# Altium PCB Copy of RT_SUPER_MK90.PCBdoc (part 1 of 3)
Units mil, origin at the board's own origin, x right, y up, seen from the top; angles counter-clockwise.
Board outline 1549.87 x 1549.87 mil, 4 copper layers (Top Layer, GND, PWR, Bottom Layer), stack 39.556 mil thick; 179 components, 119 nets, 506 pads, 207 vias.
Unrouted connection lines stored in the file: 7.
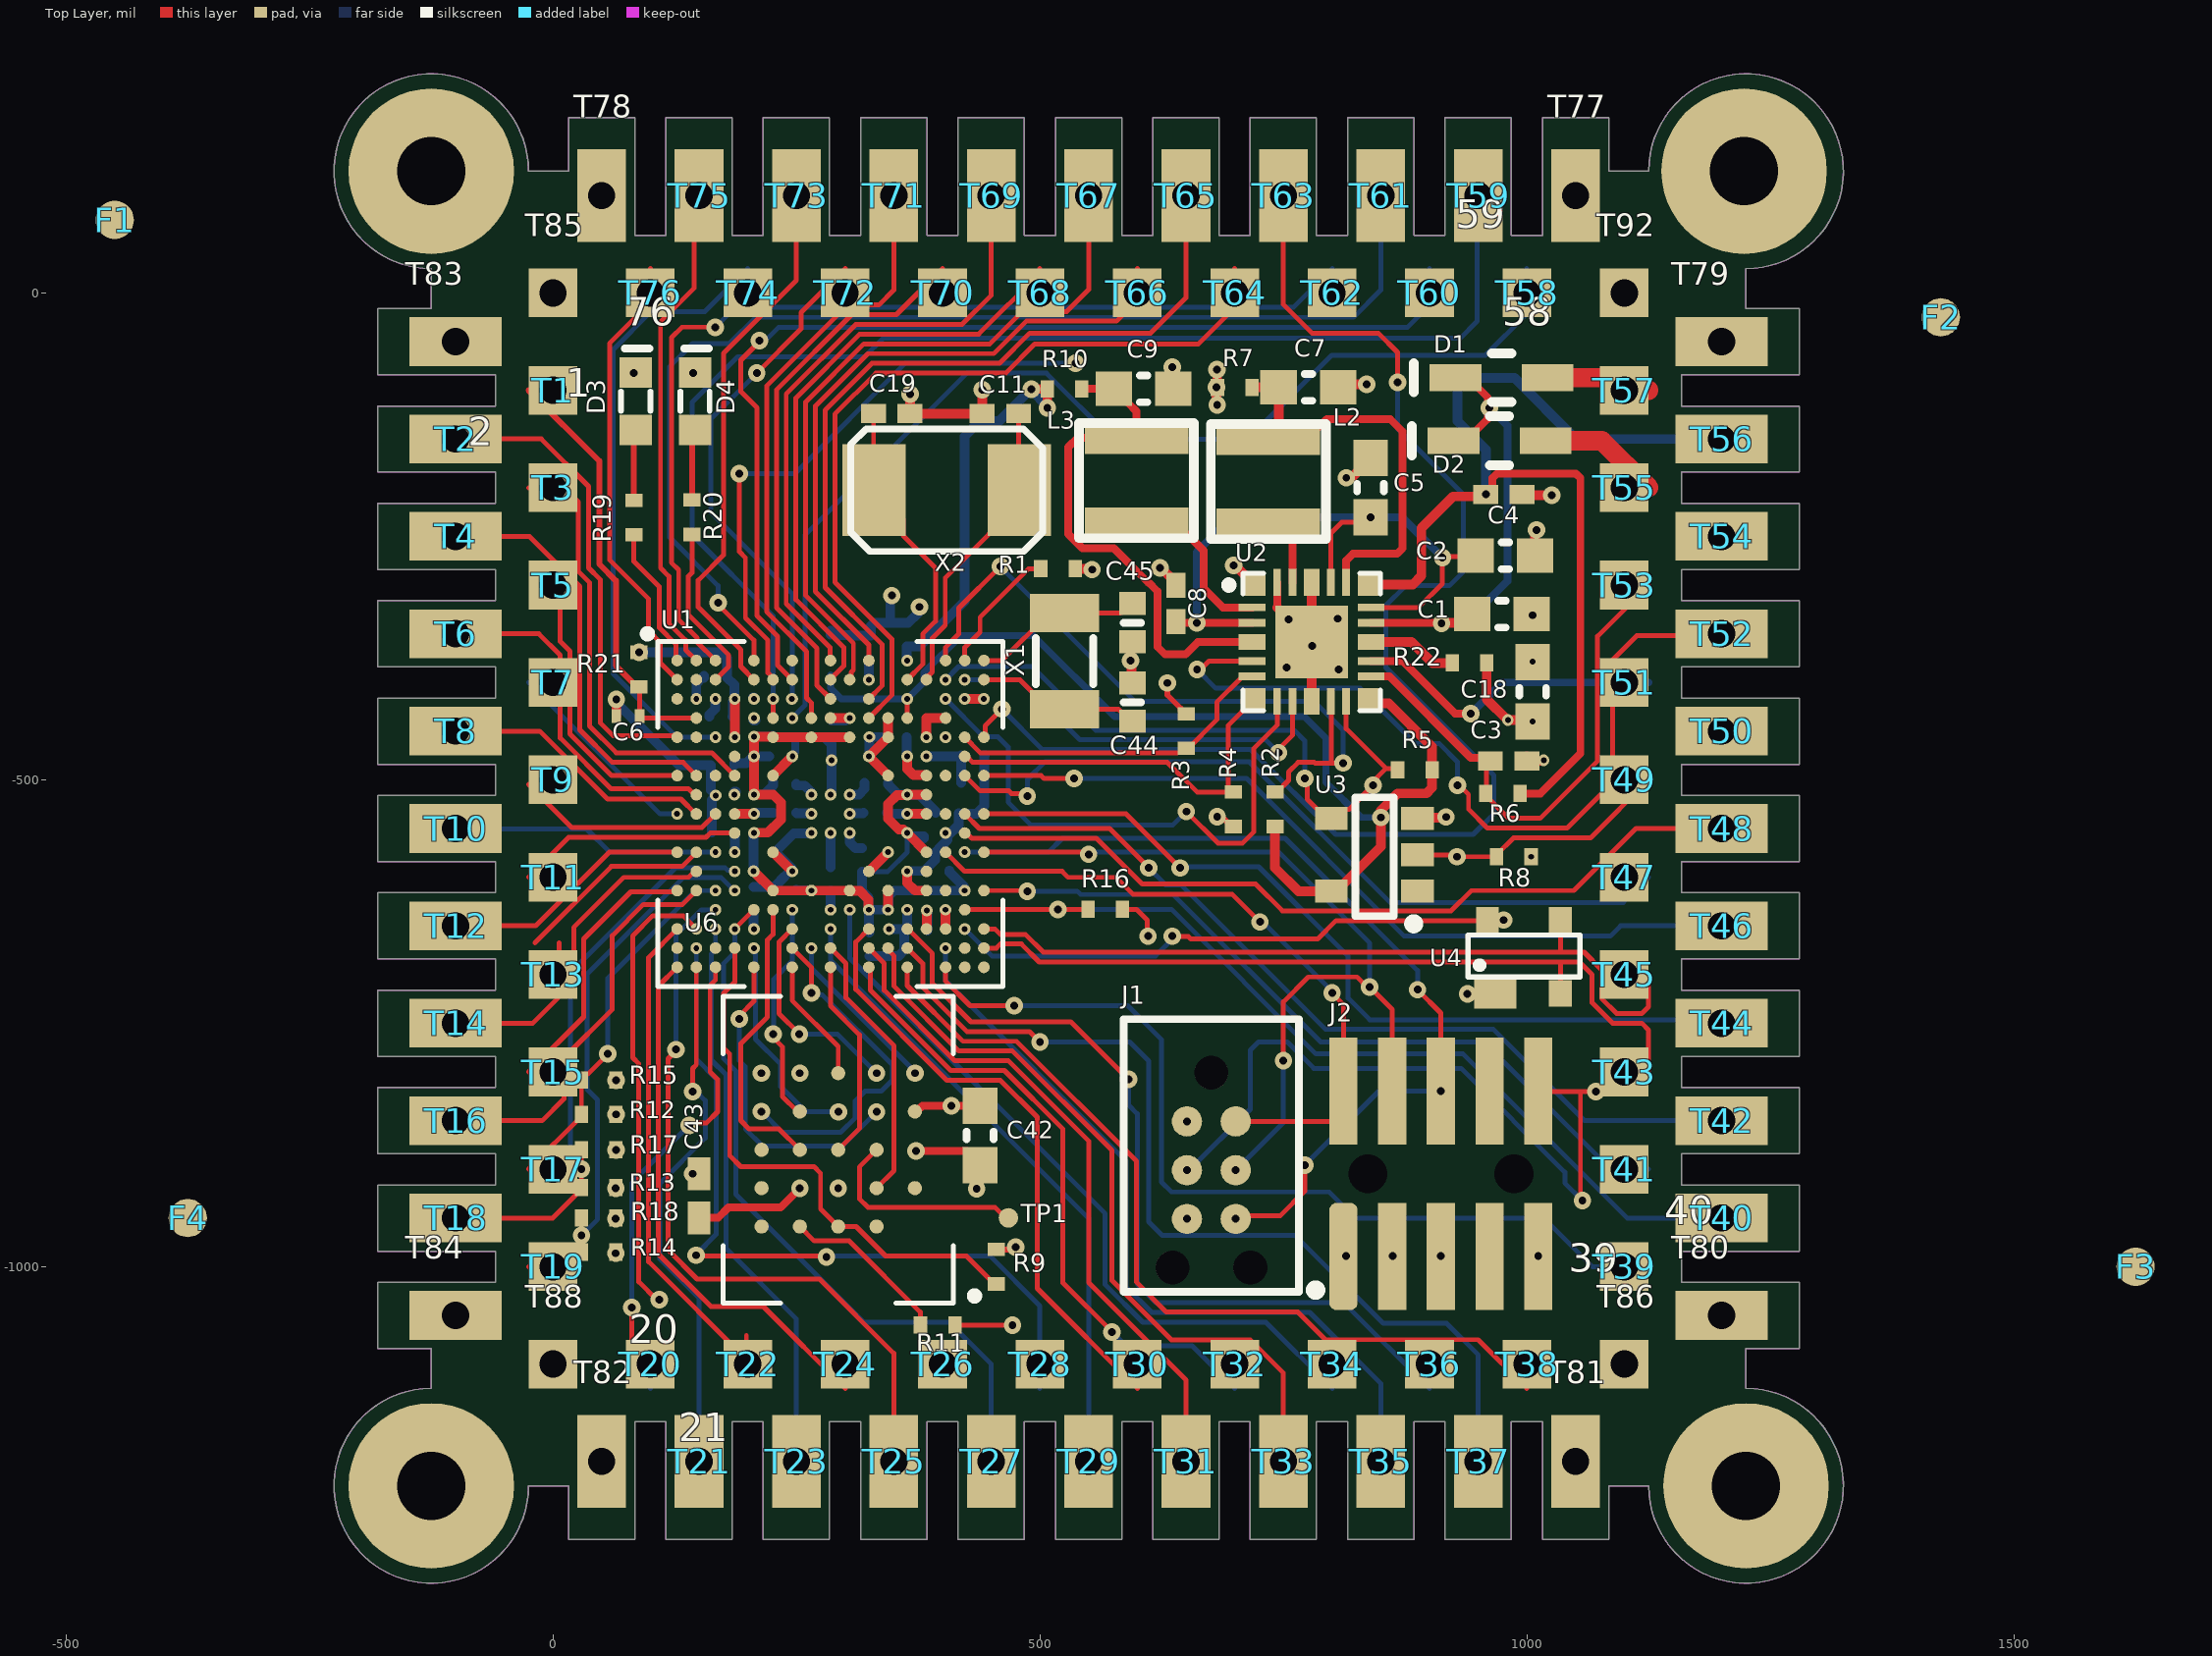
[diagram p0: Top Layer view]
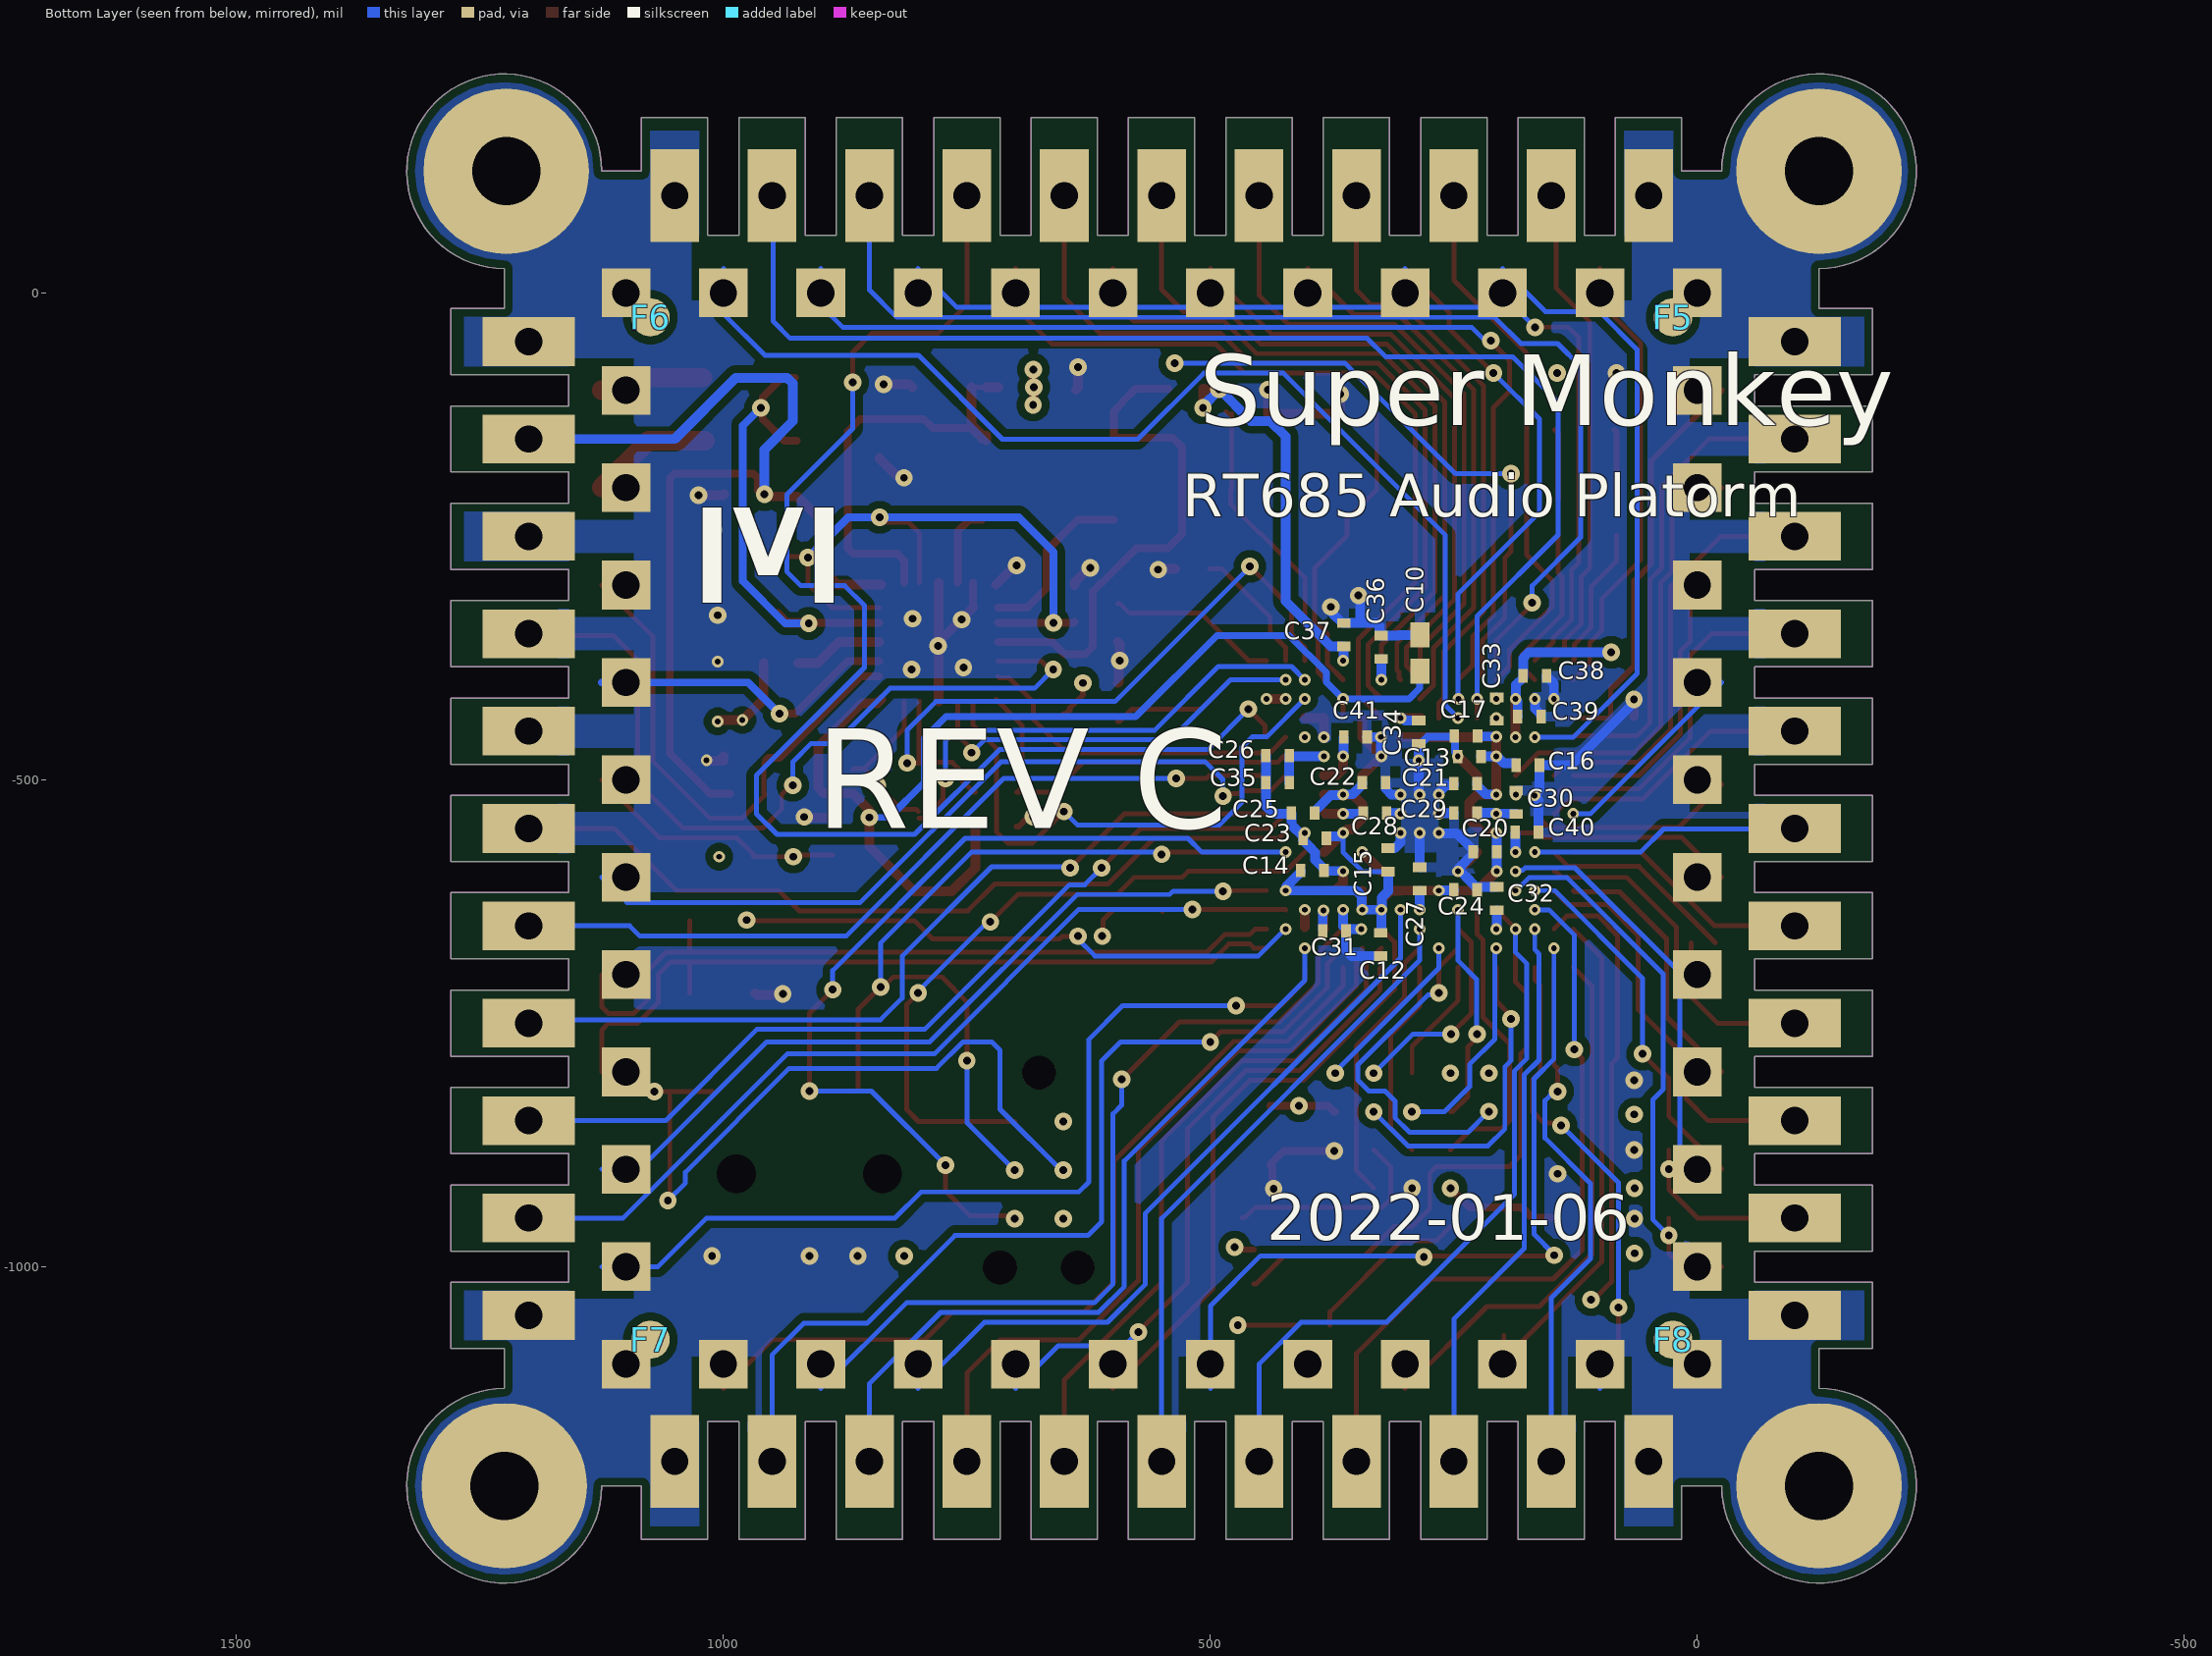
[diagram p1: Bottom Layer view, seen from below]
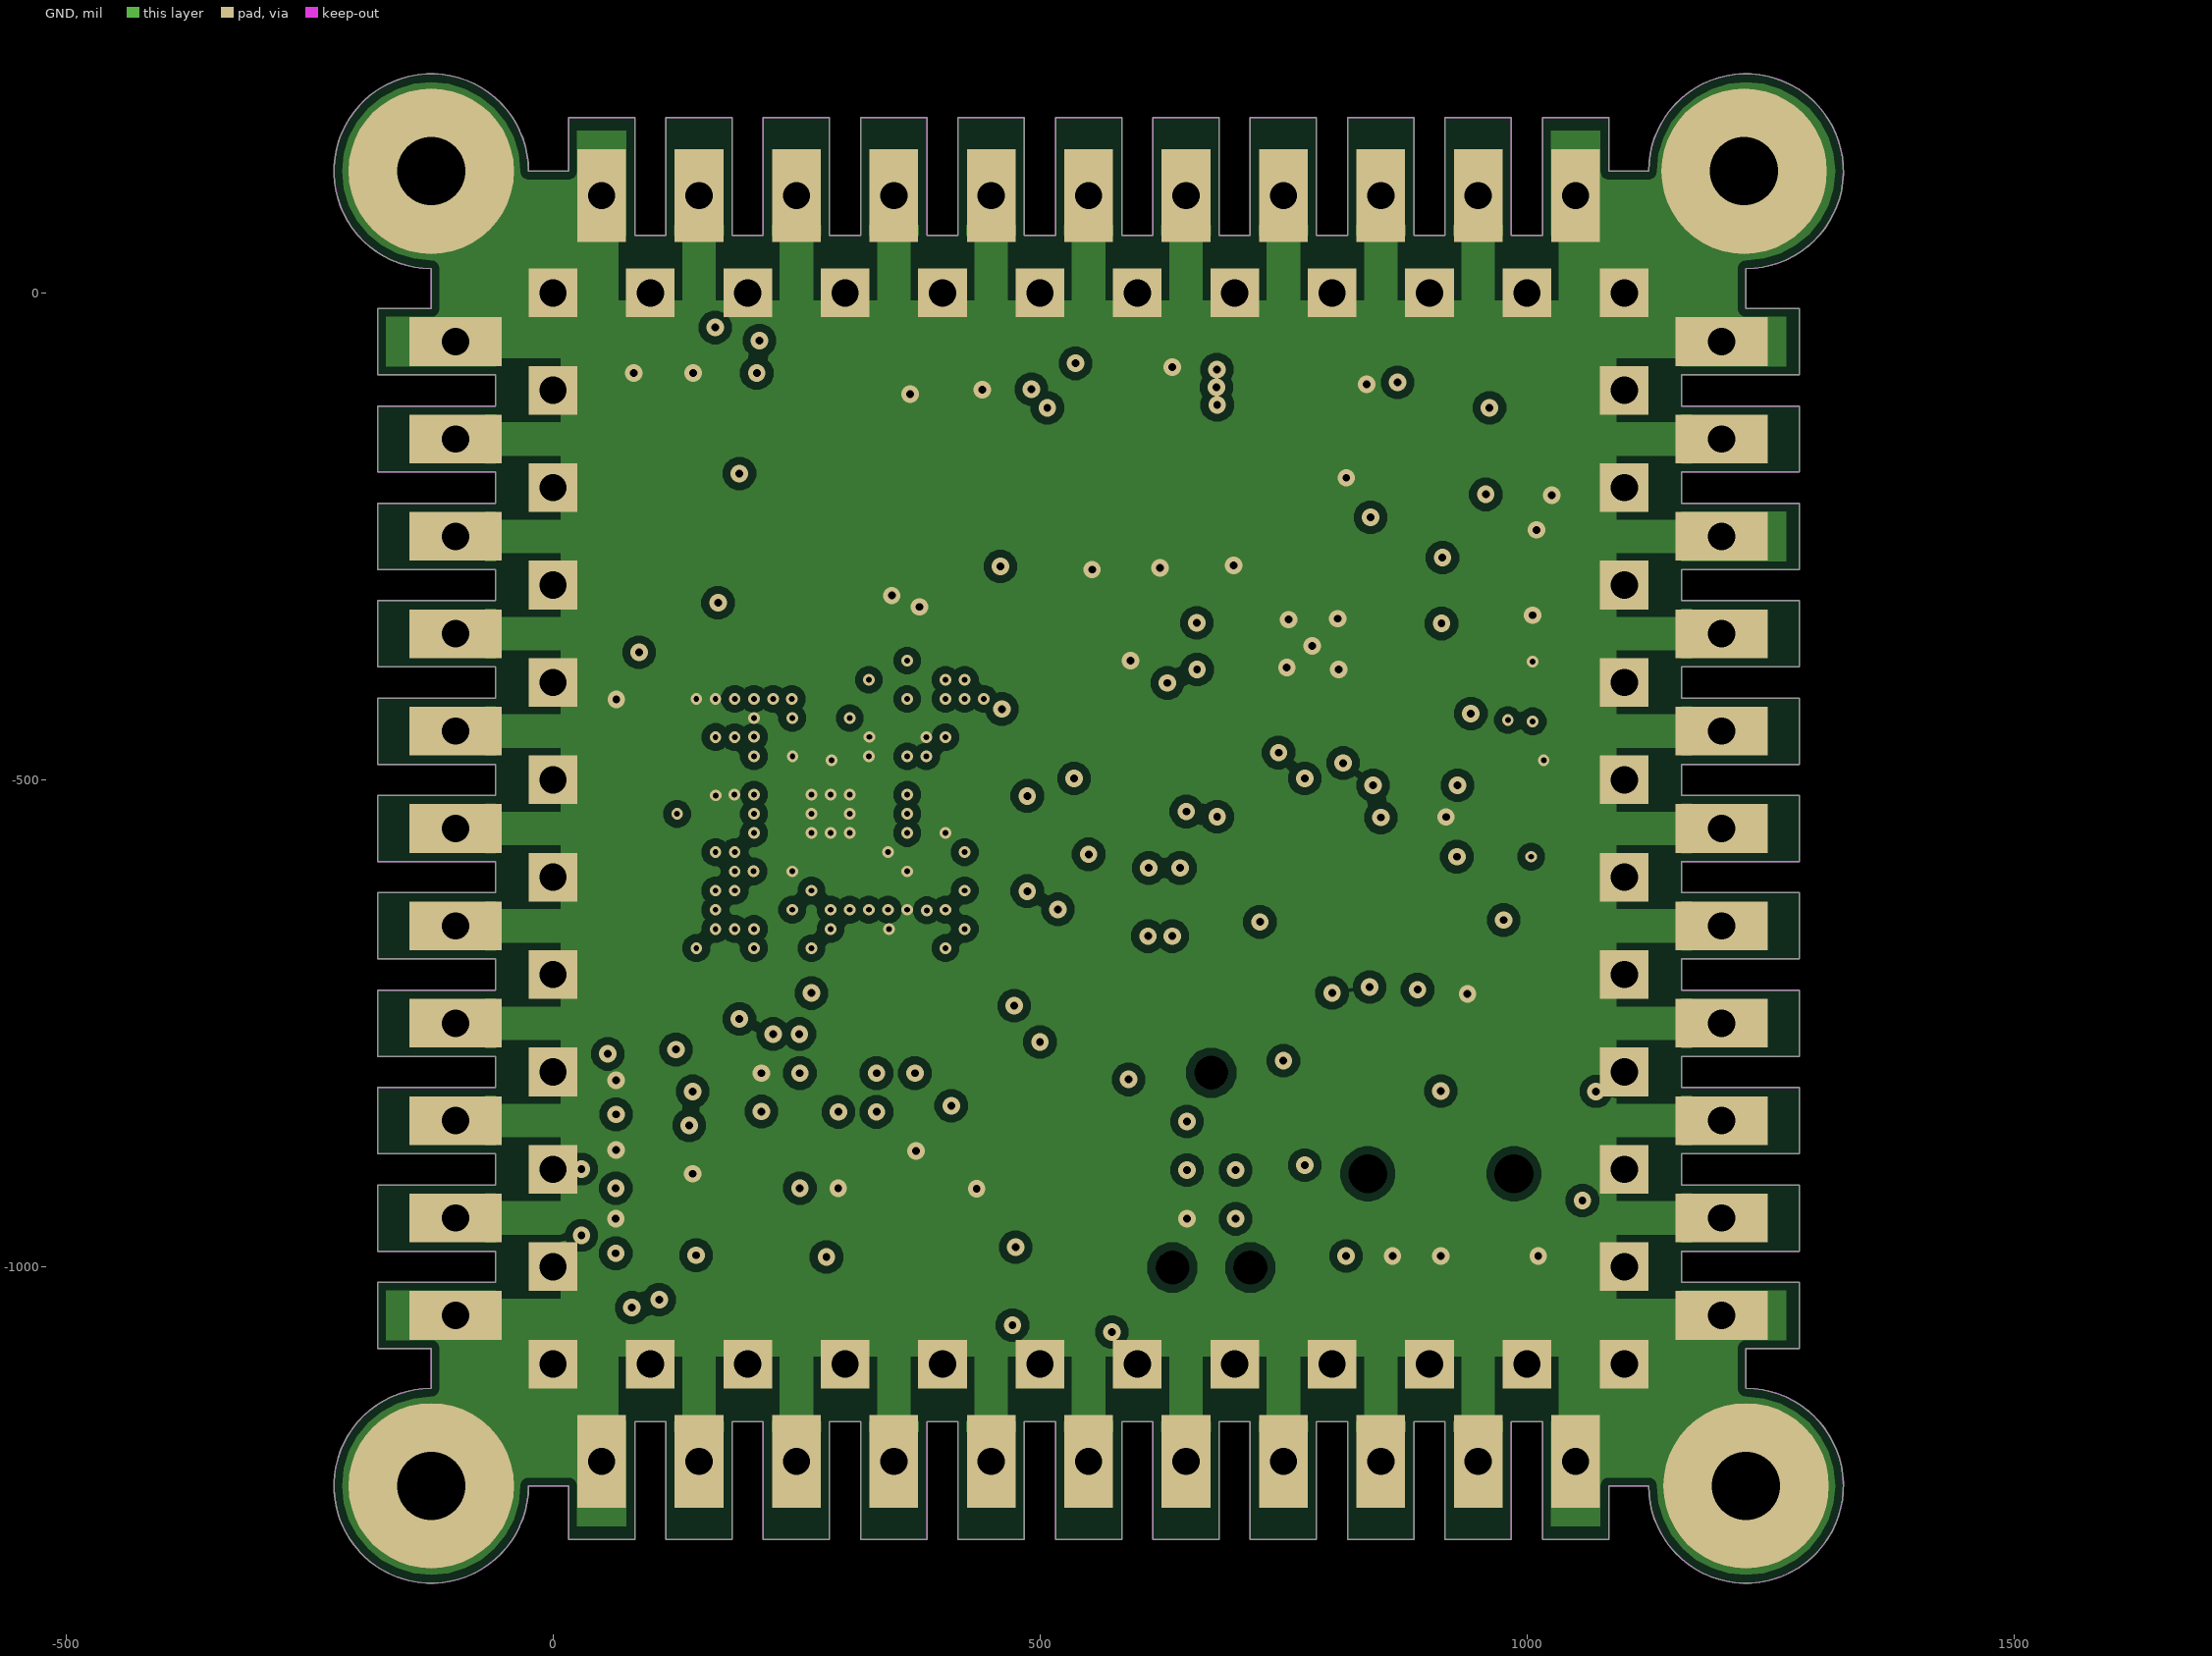
[diagram p2: GND]
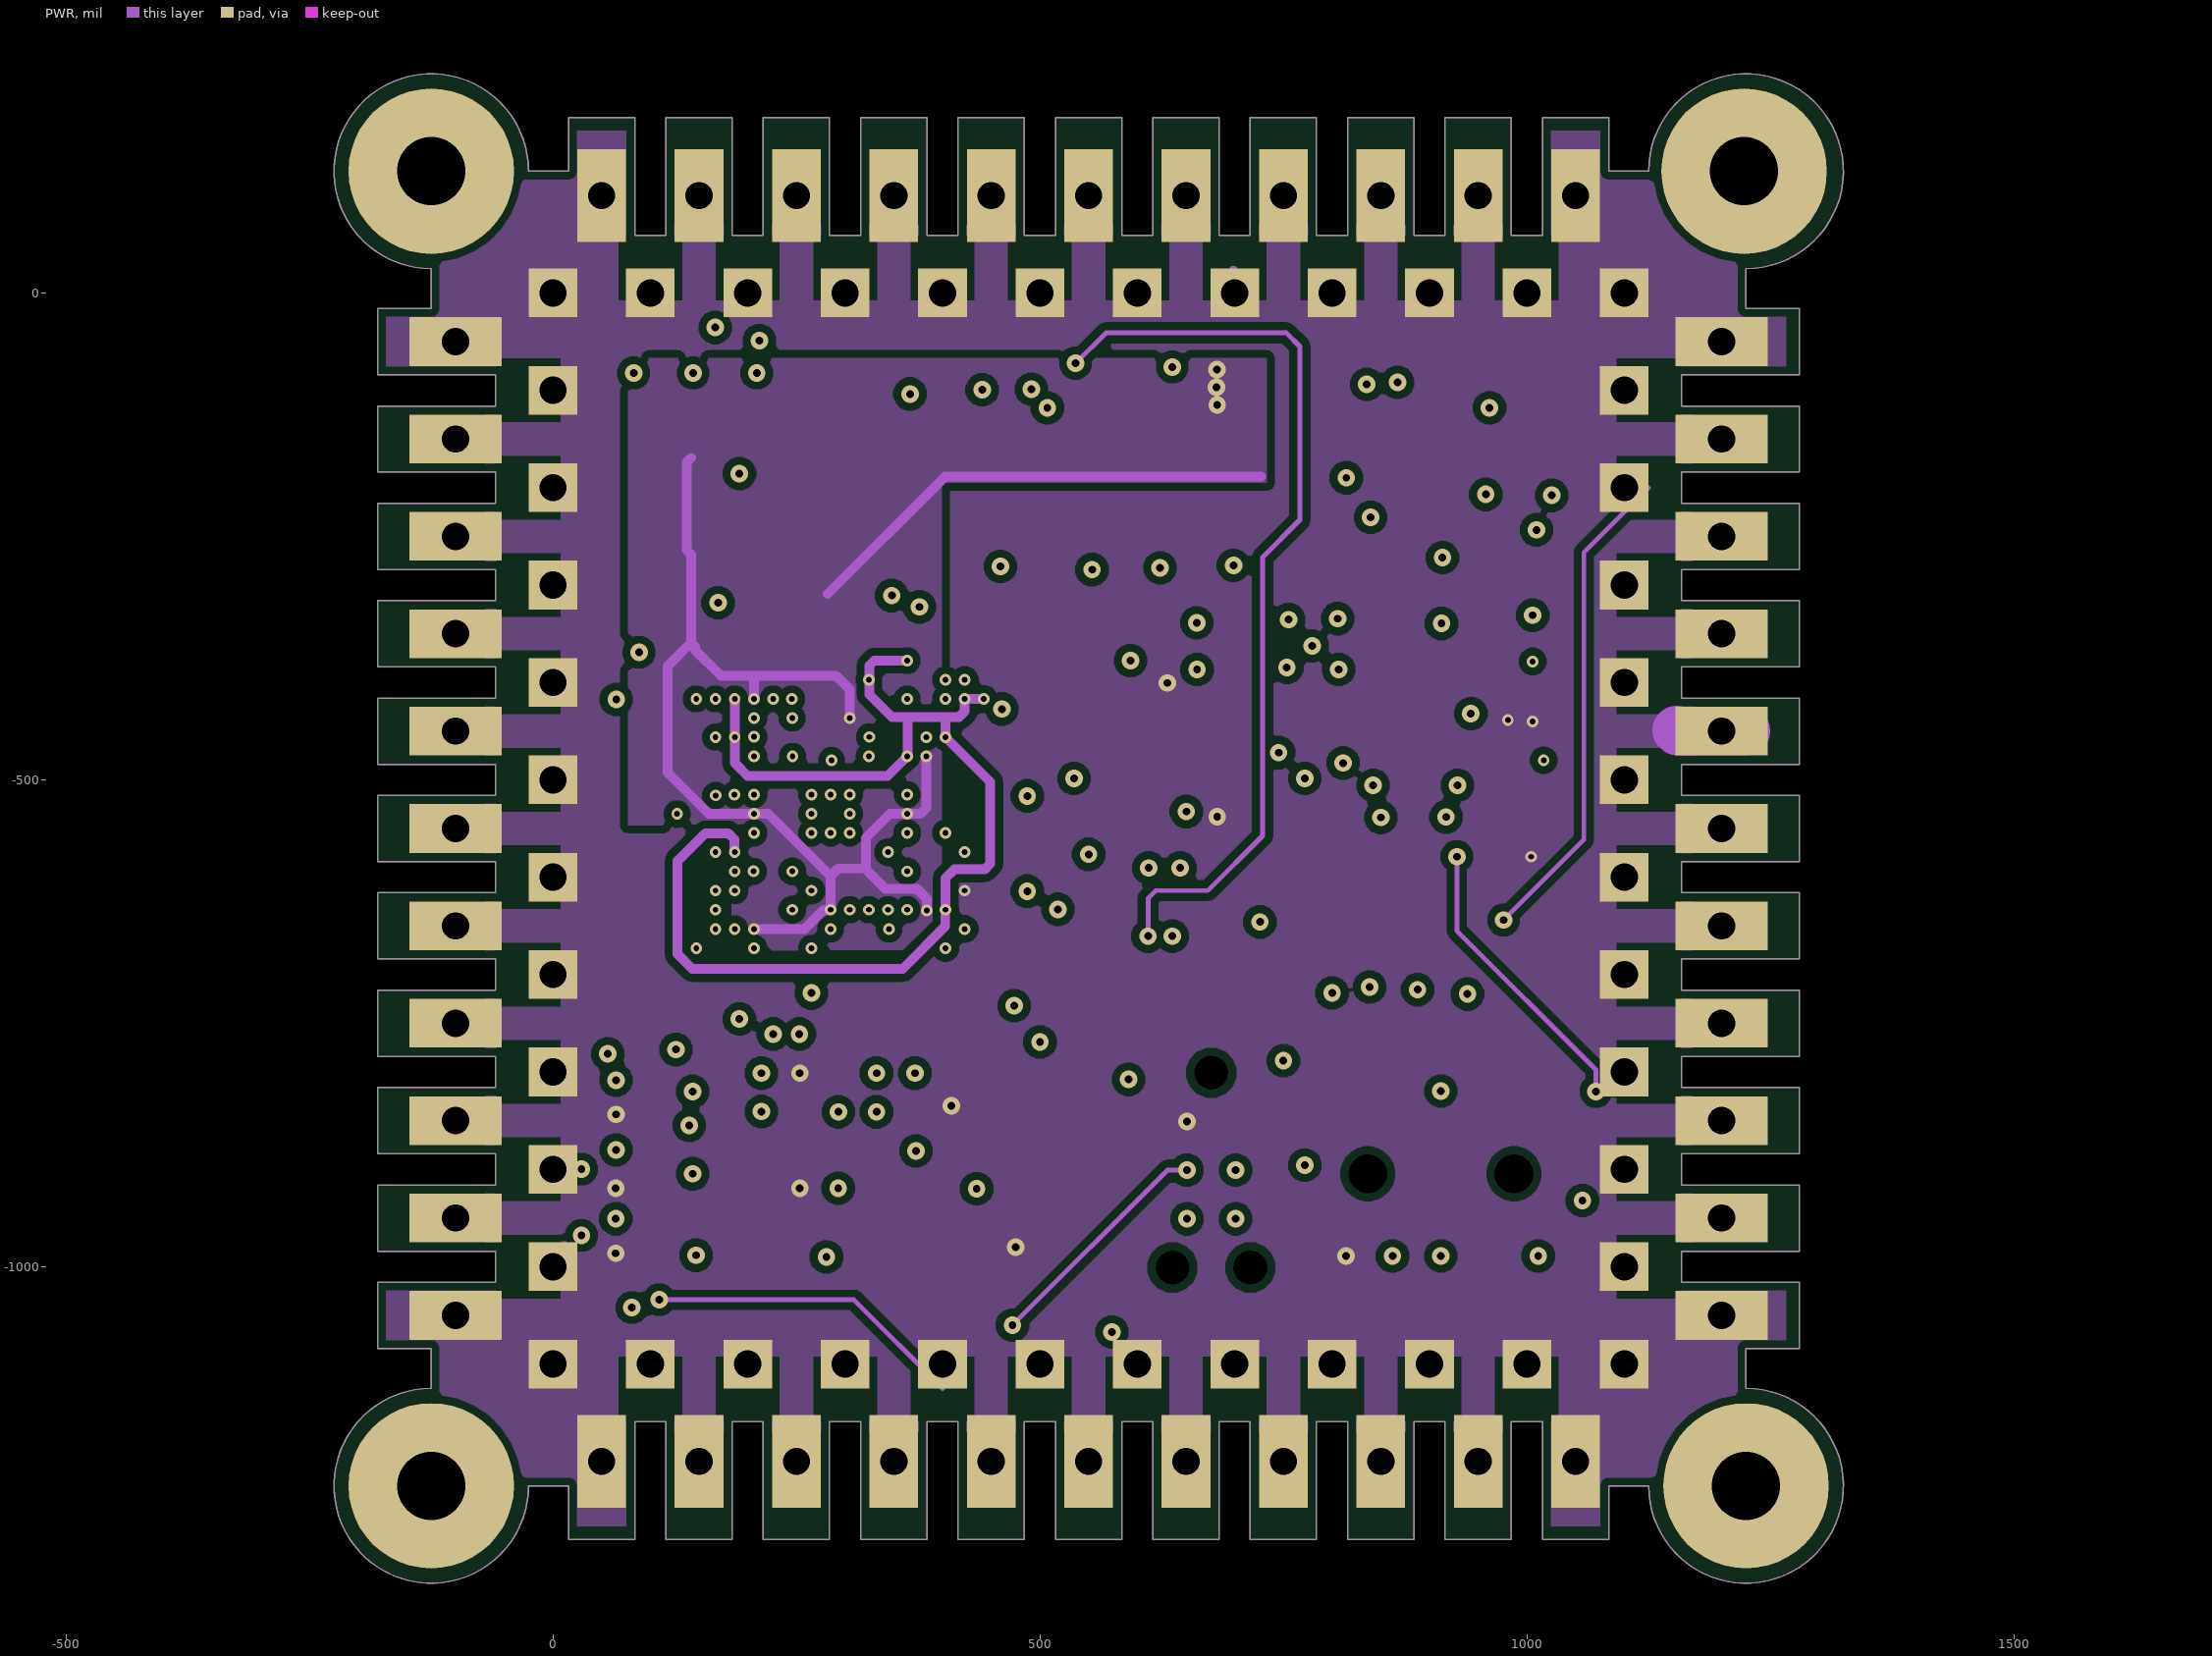
[diagram p3: PWR]

## Layer stack, top to bottom
Top Solder: solder mask 0.4, Solder Resist, Dk 3.5
Top Layer: signal copper 1.4
Dielectric 1: prepreg 2.8, PP-006, Dk 4.1
GND: signal copper 1.378
Dielectric1: dielectric 28.4, FR-4, Dk 4.8
PWR: signal copper 1.378
Dielectric 2: prepreg 2.8, PP-006, Dk 4.1
Bottom Layer: signal copper 1.4
Bottom Solder: solder mask 0.4, Solder Resist, Dk 3.5

## Board outline
-180,-1084 -125,-1084 -125,-1125 ccw(c-125,-1225) -25,-1225 16,-1225 16,-1280 84,-1280 84,-1159 116,-1159 116,-1280 184,-1280 184,-1159 216,-1159 216,-1280 284,-1280 284,-1159 316,-1159 316,-1280 384,-1280 384,-1159 416,-1159 416,-1280 484,-1280 484,-1159 516,-1159 516,-1280 584,-1280 584,-1159 616,-1159 616,-1280 684,-1280 684,-1159 716,-1159 716,-1280 784,-1280 784,-1159 816,-1159 816,-1280 884,-1280 884,-1159 916,-1159 916,-1280 984,-1280 984,-1159 1016,-1159 1016,-1280 1084,-1280 1084,-1225 1125,-1225 ccw(c1225,-1225) 1225,-1125 1225,-1084 1280,-1084 1280,-1016 1159,-1016 1159,-984 1280,-984 1280,-916 1159,-916 1159,-884 1280,-884 1280,-816 1159,-816 1159,-784 1280,-784 1280,-716 1159,-716 1159,-684 1280,-684 1280,-616 1159,-616 1159,-584 1280,-584 1280,-516 1159,-516 1159,-484 1280,-484 1280,-416 1159,-416 1159,-384 1280,-384 1280,-316 1159,-316 1159,-284 1280,-284 1280,-216 1159,-216 1159,-184 1280,-184 1280,-116 1159,-116 1159,-84 1280,-84 1280,-16 1225,-16 1225,25 ccw(c1225,125) 1125,125 1084,125 1084,180 1016,180 1016,59 984,59 984,180 916,180 916,59 884,59 884,180 816,180 816,59 784,59 784,180 716,180 716,59 684,59 684,180 616,180 616,59 584,59 584,180 516,180 516,59 484,59 484,180 416,180 416,59 384,59 384,180 316,180 316,59 284,59 284,180 216,180 216,59 184,59 184,180 116,180 116,59 84,59 84,180 16,180 16,125 -25,125 ccw(c-125,125) -125,25 -125,-16 -180,-16 -180,-84 -59,-84 -59,-116 -180,-116 -180,-184 -59,-184 -59,-216 -180,-216 -180,-284 -59,-284 -59,-316 -180,-316 -180,-384 -59,-384 -59,-416 -180,-416 -180,-484 -59,-484 -59,-516 -180,-516 -180,-584 -59,-584 -59,-616 -180,-616 -180,-684 -59,-684 -59,-716 -180,-716 -180,-784 -59,-784 -59,-816 -180,-816 -180,-884 -59,-884 -59,-916 -180,-916 -180,-984 -59,-984 -59,-1016 -180,-1016

## Design rules (kind name [scope] priority, off if disabled: settings)
Clearance [All] p1: gap=5 ignorepadtopadclearanceinfootprint=FALSE except(8: Arc-Poly Track-Poly SMDPad-Poly THPad-Poly Via-Poly Fill-Poly Poly-Poly)
ComponentClearance ComponentClearance_1 [HasFootprint('ER-TFT1.54-1')] p1: gap=0 collisioncheckmode=3 verticalgap=0 showdistances=FALSE
ComponentClearance [All] p2: gap=5 collisioncheckmode=3 verticalgap=5 showdistances=FALSE
PlaneClearance [All] p1: clearance=10
PolygonConnect PolygonConnect_2 [InNet('GND')] p1: thpad.connectstyle=Direct thpad.reliefconductorwidth=10 thpad.reliefentries=4 thpad.polygonreliefangle="90 Angle" thpad.airgapwidth=10 smdpad.connectstyle=Relief smdpad.reliefconductorwidth=10 smdpad.reliefentries=4 smdpad.polygonreliefangle="90 Angle" smdpad.airgapwidth=10 via.connectstyle=Direct via.reliefconductorwidth=10 via.reliefentries=4 via.polygonreliefangle="90 Angle" via.airgapwidth=10
PolygonConnect PolygonConnect_1 [IsVia] p2: connectstyle=Direct reliefconductorwidth=10 reliefentries=4 polygonreliefangle="90 Angle" airgapwidth=10
PolygonConnect [All] p3: connectstyle=Relief reliefconductorwidth=10 reliefentries=4 polygonreliefangle="90 Angle" airgapwidth=5
RoutingVias [All] p1: holewidth=12 width=26 viastyle="Through Hole" minholewidth=6 minwidth=6 maxholewidth=50 maxwidth=75
SilkToSolderMaskClearance SilkscreenOverComponentPads [IsPad] p1: minsilkscreentomaskgap=10 clearancetoexposedcopper=TRUE
SolderMaskExpansion [All] p1: expansion=4 istentingtop=FALSE
SupplyNets "Schematic Supply Nets_10" [InNet('+3v3')] p1: voltage=0.000
SupplyNets "Schematic Supply Nets_9" [InNet('GND')] p2: voltage=0.000
SupplyNets "Schematic Supply Nets_8" [InNet('+5vUSB')] p3: voltage=0.000
SupplyNets "Schematic Supply Nets_7" [InNet('VDDIO0')] p4: voltage=0.000
SupplyNets "Schematic Supply Nets_6" [InNet('VDD_CORE')] p5: voltage=0.000
SupplyNets "Schematic Supply Nets_5" [InNet('+VIN')] p6: voltage=0.000
SupplyNets "Schematic Supply Nets_4" [InNet('+VREF')] p7: voltage=0.000
SupplyNets "Schematic Supply Nets_3" [InNet('+1v8_AO')] p8: voltage=0.000
SupplyNets "Schematic Supply Nets_2" [InNet('+VBATT_BU')] p9: voltage=0.000
SupplyNets "Schematic Supply Nets_1" [InNet('+1v8')] p10: voltage=0.000
SupplyNets "Schematic Supply Nets" [InNet('+VBATT')] p11: voltage=0.000
Width [All] p1: maxlimit=200 minlimit=5 preferedwidth=5
27 further rules are at their usual default settings.

## Components (designator, comment, footprint, x,y, rotation, side; value= is the part's Value field where it differs from the comment)
C1 "2.2µF" C0603_0.90MM_MD 974.48,-329.89 r180 top
C2 "4.7µF" C0603_1.00MM_MD 977.89,-269.89 r0 top
C3 "0.47µF" C0402_0.55MM_HD 981.22,-480.65 r180 top
C4 "1µF" C0402_0.55MM_HD 976.48,-206.89 r180 top
C5 "2.2µF" C0603_0.90MM_MD 839.48,-199.89 r90 top
C6 "0.1uF 6v" C0201_PERFECT 77.04,-434.61 r0 top
C7 "10µF" C0603_0.90MM_MD 775.58,-96.89 r180 top
C8 "1µF" C0402_0.55MM_HD 639.47,-318.94 r90 top
C9 "10µF" C0603_0.90MM_MD 606.53,-98.47 r180 top
C10 "1µF" C0402_0.55MM_HD 285,-369.65 r270 bottom
C11 "18pF" C0402_0.55MM_HD 459.37,-123.98 r0 top
C12 "0.1uF 6v" C0201_PERFECT 325,-669 r90 bottom
C13 "0.1uF 6v" C0201_PERFECT 234,-476 r180 bottom
C14 "0.1uF 6v" C0201_PERFECT 395.24,-593.07 r0 bottom
C15 "0.1uF 6v" C0201_PERFECT 317.48,-582.24 r270 bottom
C16 "0.1uF 6v" C0201_PERFECT 174,-485 r0 bottom
C17 "0.1uF 6v" C0201_PERFECT 237.49,-454.88 r180 bottom
C18 "2.2µF" C0603_0.90MM_MD 1006,-409.47 r270 top
C19 "18pF" C0402_0.55MM_HD 347.87,-123.98 r180 top
C20 "0.1uF 6v" C0201_PERFECT 218,-574 r180 bottom
C21 "0.1uF 6v" C0201_PERFECT 238,-504 r180 bottom
C22 "0.1uF 6v" C0201_PERFECT 332,-503 r0 bottom
C23 "0.1uF 6v" C0201_PERFECT 392.88,-560 r180 bottom
C24 "0.1uF 6v" C0201_PERFECT 238,-613 r0 bottom
C25 "0.1uF 6v" C0201_PERFECT 404.88,-534 r180 bottom
C26 "0.1uF 6v" C0201_PERFECT 431,-475 r180 bottom
C27 "0.1uF 6v" C0201_PERFECT 285,-601.74 r270 bottom
C28 "0.1uF 6v" C0201_PERFECT 331,-534 r0 bottom
C29 "0.1uF 6v" C0201_PERFECT 238,-534 r180 bottom
C30 "0.1uF 6v" C0201_PERFECT 186.08,-523 r270 bottom
C31 "0.1uF 6v" C0201_PERFECT 372.6,-655.08 r0 bottom
C32 "0.1uF 6v" C0201_PERFECT 206,-622 r270 bottom
C33 "0.1uF 6v" C0201_PERFECT 205.99,-427.29 r90 bottom
C34 "0.1uF 6v" C0201_PERFECT 286,-451 r90 bottom
C35 "0.1uF 6v" C0201_PERFECT 431,-503 r180 bottom
C36 "0.1uF 6v" C0201_PERFECT 324.57,-363.82 r270 bottom
C37 "0.1uF 6v" C0201_PERFECT 363,-350.94 r270 bottom
C38 "0.1uF 6v" C0201_PERFECT 166.89,-393.27 r0 bottom
C39 "0.1uF 6v" C0201_PERFECT 172.41,-435 r0 bottom
C40 "0.1uF 6v" C0201_PERFECT 175,-553.84 r0 bottom
C41 "0.1uF 6v" C0201_PERFECT 351,-456 r0 bottom
C42 "4.7µF" C0603_1.00MM_MD 438.54,-865.22 r270 top
C43 "0.1µF" C0402_0.55MM_MD 150,-927.22 r90 top
C44 "9.5pF" PERFECT_0402 595,-420.23 r90 top
C45 "9.5pF" PERFECT_0402 595,-338.67 r270 top
D1 "BAT760-7" D_SOD-323_P 974,-87 r180 top
D2 "BAT760-7" D_SOD-323_P 971.88,-151.79 r180 top
D3 "LED 1.6X0.8MM 570NM GRN CLR SMD" "LED_0603 - GREEN" 84.93,-111.18 r90 top
D4 "LED 1.6X0.8MM 630NM RED CLR SMD" "LED_0603 - RED" 145.87,-111.18 r90 top
F1 "PCB Fiducial" "Fiducial 1mm - 2mm" -450,75 r180 top
F2 "PCB Fiducial" "Fiducial 1mm - 2mm" 1425,-25 r180 top
F3 "PCB Fiducial" "Fiducial 1mm - 2mm" 1625,-1000 r180 top
F4 "PCB Fiducial" "Fiducial 1mm - 2mm" -375,-950 r180 top
F5 "PCB Fiducial" "Fiducial 1mm - 2mm" 25,-25 r0 bottom
F6 "PCB Fiducial" "Fiducial 1mm - 2mm" 1075,-25 r0 bottom
F7 "PCB Fiducial" "Fiducial 1mm - 2mm" 1075,-1075 r0 bottom
F8 "PCB Fiducial" "Fiducial 1mm - 2mm" 25,-1075 r0 bottom
J1 "TC2030‐CTL‐NL" "TC2030 NO LATCH" 676,-900.85 r270 top
J2 "FTSH-105-01-F-DV" FTSH-105-01-F-DV-K-A 911.67,-904.58 r0 top
L2 "2.2µH 1.5A" L_NRH3012 734.48,-193.83 r90 top
L3 "2.2µH 1.5A" L_NRH3012 599.2,-192.83 r90 top
R1 "10k" R0402_0.40MM_HD 518.51,-283.22 r180 top
R2 "20k" R0402_0.40MM_HD 741.38,-530.27 r270 top
R3 "2.2k" R0402_0.40MM_HD 650.31,-450 r90 top
R4 "2.2k" R0402_0.40MM_HD 698.74,-530.27 r270 top
R5 "20k" R0402_0.40MM_HD 884.96,-489.59 r0 top
R6 "0" R0402_0.40MM_HD 975.32,-513.99 r0 top
R7 "0" R0402_0.40MM_HD 700,-96.89 r180 top
R8 "100k" R0402_0.40MM_HD 986.67,-578.95 r0 top
R9 "100k" R0402_0.40MM_HD 455.28,-1000 r90 top
R10 "0" R0402_0.40MM_HD 525.34,-98.47 r180 top
R11 "0" R0402_0.40MM_HD 395,-1060 r180 top
R12 "100k" R0402_0.40MM_HD 47,-843.61 r0 top
R13 "100k" R0402_0.40MM_HD 47,-918.52 r0 top
R14 "100k" R0402_0.40MM_HD 47,-985 r0 top
R15 "100k" R0402_0.40MM_HD 47,-808.5 r180 top
R16 "1k" R0402_0.40MM_HD 567,-633 r180 top
R17 "100k" R0402_0.40MM_HD 47,-880 r180 top
R18 "100k" R0402_0.40MM_HD 47,-950 r180 top
R19 "1k" R0402_0.40MM_HD 83,-230.72 r270 top
R20 "1k" R0402_0.40MM_HD 142.73,-230.4 r270 top
R21 "0" R0402_0.40MM_HD 88.36,-386.74 r270 top
R22 "0" R0402_0.40MM_HD 941,-380 r0 top
T1 "SOLDER_HOLE" SQUARE-MACHINE_PIN_SOLDERHOLE 0,-100 r180 top
T2 "RECT_PAD" RECT-MACHINE_PIN_SOLDERHOLE#1 -100,-150 r180 top
T3 "SOLDER_HOLE" SQUARE-MACHINE_PIN_SOLDERHOLE 0,-200 r180 top
T4 "SOLDER_HOLE" RECT-MACHINE_PIN_SOLDERHOLE#2 -100,-250 r90 top
T5 "SOLDER_HOLE" SQUARE-MACHINE_PIN_SOLDERHOLE 0,-300 r180 top
T6 "SOLDER_HOLE" RECT-MACHINE_PIN_SOLDERHOLE#2 -100,-350 r90 top
T7 "SOLDER_HOLE" SQUARE-MACHINE_PIN_SOLDERHOLE 0,-400 r180 top
T8 "SOLDER_HOLE" RECT-MACHINE_PIN_SOLDERHOLE#2 -100,-450 r90 top
T9 "SOLDER_HOLE" SQUARE-MACHINE_PIN_SOLDERHOLE 0,-500 r180 top
T10 "SOLDER_HOLE" RECT-MACHINE_PIN_SOLDERHOLE#2 -100,-550 r90 top
T11 "SOLDER_HOLE" SQUARE-MACHINE_PIN_SOLDERHOLE 0,-600 r180 top
T12 "SOLDER_HOLE" RECT-MACHINE_PIN_SOLDERHOLE#2 -100,-650 r90 top
T13 "SOLDER_HOLE" SQUARE-MACHINE_PIN_SOLDERHOLE 0,-700 r180 top
T14 "SOLDER_HOLE" RECT-MACHINE_PIN_SOLDERHOLE#2 -100,-750 r90 top
T15 "SOLDER_HOLE" SQUARE-MACHINE_PIN_SOLDERHOLE 0,-800 r180 top
T16 "SOLDER_HOLE" RECT-MACHINE_PIN_SOLDERHOLE#2 -100,-850 r90 top
T17 "SOLDER_HOLE" SQUARE-MACHINE_PIN_SOLDERHOLE 0,-900 r180 top
T18 "SOLDER_HOLE" RECT-MACHINE_PIN_SOLDERHOLE#2 -100,-950 r90 top
T19 "SOLDER_HOLE" SQUARE-MACHINE_PIN_SOLDERHOLE 0,-1000 r180 top
T20 "SOLDER_HOLE" SQUARE-MACHINE_PIN_SOLDERHOLE 100,-1100 r180 top
T21 "SOLDER_HOLE" RECT-MACHINE_PIN_SOLDERHOLE#2 150,-1200 r180 top
T22 "SOLDER_HOLE" SQUARE-MACHINE_PIN_SOLDERHOLE 200,-1100 r180 top
T23 "SOLDER_HOLE" RECT-MACHINE_PIN_SOLDERHOLE#2 250,-1200 r180 top
T24 "SOLDER_HOLE" SQUARE-MACHINE_PIN_SOLDERHOLE 300,-1100 r180 top
T25 "SOLDER_HOLE" RECT-MACHINE_PIN_SOLDERHOLE#2 350,-1200 r180 top
T26 "SOLDER_HOLE" SQUARE-MACHINE_PIN_SOLDERHOLE 400,-1100 r180 top
T27 "SOLDER_HOLE" RECT-MACHINE_PIN_SOLDERHOLE#2 450,-1200 r180 top
T28 "SOLDER_HOLE" SQUARE-MACHINE_PIN_SOLDERHOLE 500,-1100 r180 top
T29 "SOLDER_HOLE" RECT-MACHINE_PIN_SOLDERHOLE#2 550,-1200 r180 top
T30 "SOLDER_HOLE" SQUARE-MACHINE_PIN_SOLDERHOLE 600,-1100 r180 top
T31 "SOLDER_HOLE" RECT-MACHINE_PIN_SOLDERHOLE#2 650,-1200 r180 top
T32 "SOLDER_HOLE" SQUARE-MACHINE_PIN_SOLDERHOLE 700,-1100 r180 top
T33 "SOLDER_HOLE" RECT-MACHINE_PIN_SOLDERHOLE#2 750,-1200 r180 top
T34 "SOLDER_HOLE" SQUARE-MACHINE_PIN_SOLDERHOLE 800,-1100 r180 top
T35 "SOLDER_HOLE" RECT-MACHINE_PIN_SOLDERHOLE#2 850,-1200 r180 top
T36 "SOLDER_HOLE" SQUARE-MACHINE_PIN_SOLDERHOLE 900,-1100 r180 top
T37 "SOLDER_HOLE" RECT-MACHINE_PIN_SOLDERHOLE#2 950,-1200 r180 top
T38 "SOLDER_HOLE" SQUARE-MACHINE_PIN_SOLDERHOLE 1000,-1100 r180 top
T39 "SOLDER_HOLE" SQUARE-MACHINE_PIN_SOLDERHOLE 1100,-1000 r180 top
T40 "RECT_PAD" RECT-MACHINE_PIN_SOLDERHOLE#2 1200,-950 r90 top
T41 "SOLDER_HOLE" SQUARE-MACHINE_PIN_SOLDERHOLE 1100,-900 r180 top
T42 "RECT_PAD" RECT-MACHINE_PIN_SOLDERHOLE#2 1200,-850 r90 top
T43 "SOLDER_HOLE" SQUARE-MACHINE_PIN_SOLDERHOLE 1100,-800 r180 top
T44 "SOLDER_HOLE" RECT-MACHINE_PIN_SOLDERHOLE#2 1200,-750 r90 top
T45 "SOLDER_HOLE" SQUARE-MACHINE_PIN_SOLDERHOLE 1100,-700 r180 top
T46 "RECT_PAD" RECT-MACHINE_PIN_SOLDERHOLE#2 1200,-650 r90 top
T47 "SOLDER_HOLE" SQUARE-MACHINE_PIN_SOLDERHOLE 1100,-600 r180 top
T48 "SOLDER_HOLE" RECT-MACHINE_PIN_SOLDERHOLE#2 1200,-550 r90 top
T49 "SOLDER_HOLE" SQUARE-MACHINE_PIN_SOLDERHOLE 1100,-500 r180 top
T50 "SOLDER_HOLE" RECT-MACHINE_PIN_SOLDERHOLE#2 1200,-450 r90 top
T51 "SOLDER_HOLE" SQUARE-MACHINE_PIN_SOLDERHOLE 1100,-400 r180 top
T52 "RECT_PAD" RECT-MACHINE_PIN_SOLDERHOLE#2 1200,-350 r90 top
T53 "SOLDER_HOLE" SQUARE-MACHINE_PIN_SOLDERHOLE 1100,-300 r180 top
T54 "SOLDER_HOLE" RECT-MACHINE_PIN_SOLDERHOLE#2 1200,-250 r90 top
T55 "SOLDER_HOLE" SQUARE-MACHINE_PIN_SOLDERHOLE 1100,-200 r180 top
T56 "RECT_PAD" RECT-MACHINE_PIN_SOLDERHOLE#2 1200,-150 r90 top
T57 "SOLDER_HOLE" SQUARE-MACHINE_PIN_SOLDERHOLE 1100,-100 r180 top
T58 "SOLDER_HOLE" SQUARE-MACHINE_PIN_SOLDERHOLE 1000,0 r180 top
T59 "SOLDER_HOLE" RECT-MACHINE_PIN_SOLDERHOLE#2 950,100 r180 top
T60 "SOLDER_HOLE" SQUARE-MACHINE_PIN_SOLDERHOLE 900,0 r180 top
T61 "RECT_PAD" RECT-MACHINE_PIN_SOLDERHOLE#2 850,100 r180 top
T62 "SOLDER_HOLE" SQUARE-MACHINE_PIN_SOLDERHOLE 800,0 r180 top
T63 "SOLDER_HOLE" RECT-MACHINE_PIN_SOLDERHOLE#2 750,100 r180 top
T64 "SOLDER_HOLE" SQUARE-MACHINE_PIN_SOLDERHOLE 700,0 r180 top
T65 "RECT_PAD" RECT-MACHINE_PIN_SOLDERHOLE#2 650,100 r180 top
T66 "SOLDER_HOLE" SQUARE-MACHINE_PIN_SOLDERHOLE 600,0 r180 top
T67 "RECT_PAD" RECT-MACHINE_PIN_SOLDERHOLE#2 550,100 r180 top
T68 "SOLDER_HOLE" SQUARE-MACHINE_PIN_SOLDERHOLE 500,0 r180 top
T69 "RECT_PAD" RECT-MACHINE_PIN_SOLDERHOLE#2 450,100 r180 top
T70 "SOLDER_HOLE" SQUARE-MACHINE_PIN_SOLDERHOLE 400,0 r180 top
T71 "RECT_PAD" RECT-MACHINE_PIN_SOLDERHOLE#2 350,100 r180 top
T72 "SOLDER_HOLE" SQUARE-MACHINE_PIN_SOLDERHOLE 300,0 r180 top
T73 "SOLDER_HOLE" RECT-MACHINE_PIN_SOLDERHOLE#2 250,100 r180 top
T74 "SOLDER_HOLE" SQUARE-MACHINE_PIN_SOLDERHOLE 200,0 r180 top
T75 "SOLDER_HOLE" RECT-MACHINE_PIN_SOLDERHOLE#2 150,100 r180 top
T76 "SOLDER_HOLE" SQUARE-MACHINE_PIN_SOLDERHOLE 100,0 r180 top
T77 "RECT_PAD" RECT-MACHINE_PIN_SOLDERHOLE#2 1050,100 r0 top
T78 "RECT_PAD" RECT-MACHINE_PIN_SOLDERHOLE#2 50,100 r0 top
T79 "RECT_PAD" RECT-MACHINE_PIN_SOLDERHOLE#2 1200,-50 r90 top
T80 "RECT_PAD" RECT-MACHINE_PIN_SOLDERHOLE#2 1200,-1050 r90 top
T81 "RECT_PAD" RECT-MACHINE_PIN_SOLDERHOLE#2 1050,-1200 r0 top
T82 "RECT_PAD" RECT-MACHINE_PIN_SOLDERHOLE#2 50,-1200 r0 top
T83 "RECT_PAD" RECT-MACHINE_PIN_SOLDERHOLE#2 -100,-50 r90 top
T84 "RECT_PAD" RECT-MACHINE_PIN_SOLDERHOLE#2 -100,-1050 r90 top
T85 "SOLDER_HOLE" SQUARE-MACHINE_PIN_SOLDERHOLE 0,0 r0 top
T86 "SOLDER_HOLE" SQUARE-MACHINE_PIN_SOLDERHOLE 1100,-1100 r0 top
T88 "SOLDER_HOLE" SQUARE-MACHINE_PIN_SOLDERHOLE 0,-1100 r0 top
T92 "SOLDER_HOLE" SQUARE-MACHINE_PIN_SOLDERHOLE 1100,0 r0 top
TP1 "SMT_TEST" "SMT_TP - 20" 467.65,-949.85 r180 top
U1 "MIMXRT685SFVKB" VFBGA176 285,-535 r0 top locked
U2 "PCA9420BSAZ" PCA9420 778.98,-358.39 r0 top
U3 "SN74AUC1G07DBVR" SOT23-5 843.43,-576.98 r180 top
U4 "PRTR5V0U2X,215" SOT143B 967.37,-719.37 r0 top
U6 "APS6408L-3OBM-BA" BGA24C100P5X5_600X800X120 292.87,-880 r180 top
X1 "32.768kHz" XTAL_3215 525.34,-378.07 r270 top
X2 "24MHz" ABM3 404.27,-202.46 r0 top

## Footprints (in the part's own frame and the unit in brackets; to place one, negate y for a bottom-side part, rotate by r counter-clockwise, add the part's x,y. Pads: shape width x height; smd on the part's side, far side on the other; paste and mask are expansions set on the pad)
ABM3 [mm] "Abracon Crystal 5x3.2mm"
  rect 1.651x2.4 smd: 1(-1.9,0) 2(1.9,0)
  silkscreen extent -2.5,-1.6 2.5,1.6, body extent -2.5,-1.6 2.5,1.6, height 1.3
BGA24C100P5X5_600X800X120 [mm]
  round 0.37 smd: A2(-1,2) A3(0,2) A4(1,2) A5(2,2) B1(-2,1) B2(-1,1) B3(0,1) B4(1,1) B5(2,1) C1(-2,0) C2(-1,0) C3(0,0) C4(1,0) C5(2,0) D1(-2,-1) D2(-1,-1) D3(0,-1) D4(1,-1) D5(2,-1) E1(-2,-2) E2(-1,-2) E3(0,-2) E4(1,-2) E5(2,-2)
  silkscreen extent -3.66,-4 3,4, body extent -3,-4 3,4, height 1.2
C0201_PERFECT [mm] "Chip Capacitor, 2-Leads, Body 0.60x0.35mm, IPC High https://www.worthingtonassembly.com/blog/2018/1/29/the-perfect-0201-footprint"
  rect 0.25x0.35 smd mask+0.05: 1(-0.305,0) 2(0.305,0)
  body extent -0.3,-0.2 0.3,0.2, height 0.3
C0402_0.55MM_HD [mm] "Capacitor 0402 0.55mm Height- High Density"
  rect 0.65x0.5 smd: 1(-0.475,0) 2(0.475,0)
  body extent -0.53,-0.25 0.48,0.25, height 0.55
C0402_0.55MM_MD [mm] "Capacitor - 0402 - Medium Density"
  rect 0.85x0.6 smd: 1(-0.575,0) 2(0.575,0)
  body extent -0.5,-0.25 0.5,0.25, height 0.55
C0603_0.90MM_MD [mm] "Capacitor 0603 - Medium Density"
  rect 0.95x0.9 smd: 1(-0.775,0) 2(0.775,0)
  silkscreen extent -0.1,-0.35 0.1,0.35, body extent -0.8,-0.4 0.8,0.4, height 0.9
C0603_1.00MM_MD [mm] "Capacitor 0603 - Medium Density"
  rect 0.95x0.9 smd: 1(-0.775,0) 2(0.775,0)
  silkscreen extent -0.1,-0.35 0.1,0.35, body extent -0.8,-0.4 0.8,0.4, height 1
D_SOD-323_P [mm] "SOD-123 Diode - Polarized"
  rect 1.35x0.7 smd: 1(-1.2,0) 2(1.2,0)
  silkscreen extent -0.25,-0.64 2.29,0.64, body extent -1.3,-0.68 1.3,0.67, height 1.1
"Fiducial 1mm - 2mm" [mm] "1mm Pad 2mm Opening"
  round 1 smd paste-10 mask+0.5: 1(0,0)
FTSH-105-01-F-DV-K-A [mil] "Samtec FTSH-105-01-F-DV-K-A SMT Connector"
  rrect50% 29x110 smd: 1(-100,-85)
  rect 29x110 smd: 2(-100,85) 3(-50,-85) 4(-50,85) 5(0,-85) 6(0,85) 7(50,-85) 8(50,85) 9(100,-85) 10(100,85)
  round 5 hole 40 unplated mask+20: A(-75,0) A(75,0)
  silkscreen extent -134,-124 -124,-114, body extent -125,-115 125,115, height 241
L_NRH3012 [mm] "Inductor"
  rect 0.8x2.7 smd: 1(-1.1,0) 2(1.1,0)
  silkscreen extent -1.5,-1.5 1.5,1.5, body extent -1.5,-1.5 1.5,1.5, height 1.2
"LED_0603 - GREEN" [mm] "LED_0603 - GREEN"
  rect 0.8x0.85 smd: A(-0.75,0) C(0.75,0)
  silkscreen extent -0.25,-0.38 1.37,0.38, body extent -0.8,-0.4 0.8,0.4, height 0.75
"LED_0603 - RED" [mm] "LED_0603"
  rect 0.8x0.85 smd: A(-0.75,0) C(0.75,0)
  silkscreen extent -0.25,-0.38 1.37,0.38, body extent -0.8,-0.4 0.8,0.4, height 0.75
PCA9420 [mm]
  rect 0.7x0.2 smd mask+0.051: 1(-1.55,0.9) 2(-1.55,0.5) 4(-1.55,-0.5) 5(-1.55,-0.9) 13(1.55,-0.9) 14(1.55,-0.5) 16(1.55,0.5) 17(1.55,0.9)
  rect 0.7x0.4 smd mask+0.051: 3(-1.55,0) 15(1.55,0)
  rect 0.584x0.584 smd mask+0.051: 6(-1.5,-1.5) 12(1.5,-1.5) 18(1.5,1.5) 24(-1.5,1.5)
  rect 0.2x0.7 smd mask+0.051: 7(-0.9,-1.55) 8(-0.5,-1.55) 10(0.5,-1.55) 11(0.9,-1.55) 19(0.9,1.55) 20(0.5,1.55) 22(-0.5,1.55) 23(-0.9,1.55)
  rect 0.4x0.7 smd mask+0.051: 9(0,-1.55) 21(0,1.55)
  rect 1.9x1.9 smd mask+0.051: 25(0,0)
  silkscreen extent -2.26,-1.8 1.8,1.8, body extent -1.5,-1.5 1.5,1.5, height 1
PERFECT_0402 [mm] "https://www.worthingtonassembly.com/perfect-0402-footprint"
  rect 0.6x0.7 smd: 1(-0.5,0) 2(0.5,0)
  silkscreen extent 0,-0.23 0,0.23, body extent -0.5,-0.25 0.5,0.25, height 0.5
R0402_0.40MM_HD [mm] "Resistor 0402 High Density"
  rect 0.35x0.45 smd: 1(-0.45,0) 2(0.45,0)
  body extent -0.5,-0.25 0.5,0.25, height 0.4
RECT-MACHINE_PIN_SOLDERHOLE#1 [mil]
  rect 95x50 hole 28: 1(0,0)
  body extent -20,-20 20,20, height 174
RECT-MACHINE_PIN_SOLDERHOLE#2 [mil]
  rect 50x95 hole 28: 1(0,0)
  body extent -20,-20 20,20, height 174
"SMT_TP - 20" [mil] ".020\" SMT Test pad"
  round 20 smd paste-25: 1(0,0)
SOT23-5 [mm] "SOT23, 5-Leads, Body 3.1x2.6mm (max), Pitch 0.95mm, IPC High Density"
  rect 0.85x0.6 smd: 1(-1.125,0.95) 2(-1.125,0) 3(-1.125,-0.95) 4(1.125,-0.95) 5(1.125,0.95)
  silkscreen extent -1.15,-1.5 0.5,1.92, body extent -1.38,-1.45 1.32,1.45, height 1.15
SOT143B [mm] "SOT143B"
  rect 1.1x0.8 smd: 1(0,0)
  rect 0.6x0.7 smd: 2(1.702,0) 3(1.702,1.9) 4(-0.2,1.9)
  silkscreen extent -0.71,0.43 2.21,1.52, body extent -0.7,-0.27 2.22,2.15, height 1
SQUARE-MACHINE_PIN_SOLDERHOLE [mil]
  rect 50x50 hole 28: 1(0,0)
  body extent -20,-20 20,20, height 174
"TC2030 NO LATCH" [mil] "TC2030  NO LATCH"
  round 31 smd paste-40: 1(-50,-25) 2(-50,25) 3(0,-25) 4(0,25) 5(50,-25) 6(50,25)
  round 34 hole 35 unplated: A(-100,0) B(100,40) C(100,-40)
  silkscreen extent -155,-90 125,90
VFBGA176 [mil]
  round 12 smd paste+0 mask+0: A1(-157.48,157.48) A2(-137.8,157.48) A3(-118.11,157.48) A5(-78.74,157.48) A7(-39.37,157.48) A9(0,157.48) A11(39.37,157.48) A13(78.74,157.48) A15(118.11,157.48) A16(137.8,157.48) A17(157.48,157.48) B1(-157.48,137.8) B2(-137.8,137.8) B3(-118.11,137.8) B5(-78.74,137.8) B6(-59.06,137.8) B7(-39.37,137.8) B9(0,137.8) B10(19.69,137.8) B11(39.37,137.8) B13(78.74,137.8) B14(98.43,137.8) B15(118.11,137.8) B16(137.8,137.8) B17(157.48,137.8) C1(-157.48,118.11) C2(-137.8,118.11) C3(-118.11,118.11) C4(-98.43,118.11) C5(-78.74,118.11) C7(-39.37,118.11) C9(0,118.11) C11(39.37,118.11) C13(78.74,118.11) C15(118.11,118.11) C16(137.8,118.11) C17(157.48,118.11) D2(-137.8,98.43) D5(-78.74,98.43) D6(-59.06,98.43) D7(-39.37,98.43) D8(-19.68,98.43) D9(0,98.43) D11(39.37,98.43) D12(59.06,98.43) D13(78.74,98.43) D15(118.11,98.43) E1(-157.48,78.74) E2(-137.8,78.74) E3(-118.11,78.74) E4(-98.43,78.74) E6(-59.06,78.74) E8(-19.68,78.74) E10(19.69,78.74) E12(59.06,78.74) E14(98.43,78.74) E15(118.11,78.74) E16(137.8,78.74) E17(157.48,78.74) F4(-98.43,59.06) F5(-78.74,59.06) F7(-39.37,59.06) F11(39.37,59.06) F13(78.74,59.06) F14(98.43,59.06) F16(137.8,59.06) G1(-157.48,39.37) G2(-137.8,39.37) G3(-118.11,39.37) G4(-98.43,39.37) G6(-59.06,39.37) G12(59.06,39.37) G14(98.43,39.37) G15(118.11,39.37) G16(137.8,39.37) G17(157.48,39.37) H2(-137.8,19.68) H5(-78.74,19.68) H8(-19.68,19.68) H9(0,19.68) H10(19.69,19.68) H13(78.74,19.68) H14(98.43,19.68) J1(-157.48,0) J2(-137.8,0) J3(-118.11,0) J4(-98.43,0) J8(-19.68,0) J10(19.69,0) J14(98.43,0) J15(118.11,0) J16(137.8,0) J17(157.48,0) K4(-98.43,-19.69) K5(-78.74,-19.69) K8(-19.68,-19.69) K9(0,-19.69) K10(19.69,-19.69) K13(78.74,-19.69) K16(137.8,-19.69) L1(-157.48,-39.37) L2(-137.8,-39.37) L3(-118.11,-39.37) L4(-98.43,-39.37) L6(-59.06,-39.37) L12(59.06,-39.37) L14(98.43,-39.37) L15(118.11,-39.37) L16(137.8,-39.37) L17(157.48,-39.37) M2(-137.8,-59.06) M4(-98.43,-59.06) M5(-78.74,-59.06) M7(-39.37,-59.06) M11(39.37,-59.06) M13(78.74,-59.06) M14(98.43,-59.06) N1(-157.48,-78.74) N2(-137.8,-78.74) N3(-118.11,-78.74) N4(-98.43,-78.74) N6(-59.06,-78.74) N8(-19.68,-78.74) N10(19.69,-78.74) N12(59.06,-78.74) N14(98.43,-78.74) N15(118.11,-78.74) N16(137.8,-78.74) N17(157.48,-78.74) P3(-118.11,-98.43) P5(-78.74,-98.43) P6(-59.06,-98.43) P7(-39.37,-98.43) P9(0,-98.43) P10(19.69,-98.43) P11(39.37,-98.43) P12(59.06,-98.43) P13(78.74,-98.43) P16(137.8,-98.43) R1(-157.48,-118.11) R2(-137.8,-118.11) R3(-118.11,-118.11) R5(-78.74,-118.11) R7(-39.37,-118.11) R9(0,-118.11) R11(39.37,-118.11) R13(78.74,-118.11) R14(98.43,-118.11) R15(118.11,-118.11) R16(137.8,-118.11) R17(157.48,-118.11) T1(-157.48,-137.8) T2(-137.8,-137.8) T3(-118.11,-137.8) T4(-98.43,-137.8) T5(-78.74,-137.8) T7(-39.37,-137.8) T8(-19.68,-137.8) T9(0,-137.8) T11(39.37,-137.8) T12(59.06,-137.8) T13(78.74,-137.8) T15(118.11,-137.8) T16(137.8,-137.8) T17(157.48,-137.8) U1(-157.48,-157.48) U2(-137.8,-157.48) U3(-118.11,-157.48) U5(-78.74,-157.48) U7(-39.37,-157.48) U9(0,-157.48) U11(39.37,-157.48) U13(78.74,-157.48) U15(118.11,-157.48) U16(137.8,-157.48) U17(157.48,-157.48)
  silkscreen extent -192,-177 177,189, body extent -177,-177 177,177, height 34
XTAL_3215 [mm] "XTAL SMD 3.2 x 1.5 mm"
  rect 1x1.8 smd: 1(-1.25,0) 2(1.25,0)
  silkscreen extent -0.6,-0.75 0.6,0.75, body extent -1.6,-0.75 1.6,0.75, height 0.81

## Part data
C1 C5 C18: library part GCM188R70J225KE22D, "CAP CER 2.2UF 6.3V X7R 0603", Manufacturer="Murata Electronics", Operating Temperature="-55°C ~ 125°C", Package=0603, Ratings=AEC-Q200, Supplier Part Number 1=490-5316-1-ND, Temperature Coefficient=X7R, Tolerance=±10%, Voltage - Rated=6.3V, Category=Capacitors, ComponentLink1Description="Datasheet (Internal)", ComponentLink1URL=https://search.murata.co.jp/Ceramy/image/img/A01X/G101/ENG/GCM188R70J225KE22-01.pdf, ComponentLink2Description="Datasheet (External)", ComponentLink2URL=https://search.murata.co.jp/Ceramy/image/img/A01X/G101/ENG/GCM188R70J225KE22-01.pdf, Manufacturer Part Number=GCM188R70J225KE22D, Substitution Notes="2.2µF , 6.3V , ±10% , X7R , -55°C ~ 125°C , AEC-Q200 , 0603", Supplier 1=Digikey, Thickness (Max)=0.90MM
C2 C42: library part GCJ188C70J475KE02D, "CAP CER 4.7UF 6.3V X7S 0603", Manufacturer="Murata Electronics", Operating Temperature="-55°C ~ 125°C", Package=0603, Ratings=AEC-Q200, Supplier Part Number 1=490-16480-1-ND, Temperature Coefficient=X7S, Tolerance=±10%, Voltage - Rated=6.3V, Category=Capacitors, ComponentLink1Description="Datasheet (Internal)", ComponentLink1URL=https://search.murata.co.jp/Ceramy/image/img/A01X/G101/ENG/GCJ188C70J475KE02-01.pdf, ComponentLink2Description="Datasheet (External)", ComponentLink2URL=https://search.murata.co.jp/Ceramy/image/img/A01X/G101/ENG/GCJ188C70J475KE02-01.pdf, Manufacturer Part Number=GCJ188C70J475KE02D, Substitution Notes="4.7µF , 6.3V , ±10% , X7S , -55°C ~ 125°C , AEC-Q200 , 0603", Supplier 1=Digikey, Thickness (Max)=1.00MM
C3: library part GRT155R61E474KE01D, "CAP CER 0.47UF 25V X5R 0402", Manufacturer="Murata Electronics", Operating Temperature="-55°C ~ 85°C", Package=0402, Ratings=AEC-Q200, Supplier Part Number 1=490-12269-1-ND, Temperature Coefficient=X5R, Tolerance=±10%, Voltage - Rated=25V, Category=Capacitors, ComponentLink1Description="Datasheet (Internal)", ComponentLink1URL=https://search.murata.co.jp/Ceramy/image/img/A01X/partnumbering_e_02.pdf, ComponentLink2Description="Datasheet (External)", ComponentLink2URL=https://search.murata.co.jp/Ceramy/image/img/A01X/partnumbering_e_02.pdf, Manufacturer Part Number=GRT155R61E474KE01D, Substitution Notes="0.47µF , 25V , ±10% , X5R , -55°C ~ 85°C , AEC-Q200 , 0402", Supplier 1=Digikey, Thickness (Max)=0.55MM
C4 C8 C10: library part GCM155C71A105KE38D, "CAP CER 1UF 10V X7S 0402", Manufacturer="Murata Electronics", Operating Temperature="-55°C ~ 125°C", Package=0402, Ratings=AEC-Q200, Supplier Part Number 1=490-13409-1-ND, Temperature Coefficient=X7S, Tolerance=±10%, Voltage - Rated=10V, Category=Capacitors, ComponentLink1Description="Datasheet (Internal)", ComponentLink1URL=https://www.murata.com/~/media/webrenewal/support/library/catalog/products/capacitor/mlcc/c03e.ashx?la=en-us, ComponentLink2Description="Datasheet (External)", ComponentLink2URL=https://www.murata.com/~/media/webrenewal/support/library/catalog/products/capacitor/mlcc/c03e.ashx?la=en-us, Manufacturer Part Number=GCM155C71A105KE38D, Substitution Notes="1µF , 10V , ±10% , X7S , -55°C ~ 125°C , AEC-Q200 , 0402", Supplier 1=Digikey, Thickness (Max)=0.55MM
C6 C12 C13 C14 C15 C16 C17 C20 C21 C22 C23 C24 C25 C26 C27 C28 C29 C30 C31 C32 C33 C34 C35 C36 C37 C38 C39 C40 C41: library part CC0201KRX5R5BB104, "Cap Ceramic 0.1uF 6.3VDC X5R 10% SMD 0201 Paper T/R", Capacitance=100nF, Case Code (Imperial)=0201, Case Code (Metric)=0603, Dielectric=X5R, Manufacturer=Yageo, Max Operating Temperature=85°C, Min Operating Temperature=-55°C, Package Quantity=1, Resistor Type=Ceramic, Supplier Part Number 1=311-1408-1-ND, Tolerance=10%, Voltage Rating=6.3V, Case/Package=0201, Category="Ceramic Capacitors", ComponentLink1Description=https://datasheet.ciiva.com/176/mlccorderingcode-176765.pdf?src-supplier=Digi-Key, ComponentLink1URL=https://datasheet.ciiva.com/176/mlccorderingcode-176765.pdf?src-supplier=Digi-Key, ComponentLink2Description=https://datasheet.ciiva.com/176/mlccorderingcode-176766.pdf?src-supplier=Digi-Key, ComponentLink2URL=https://datasheet.ciiva.com/176/mlccorderingcode-176766.pdf?src-supplier=Digi-Key, ComponentLink3Description=https://datasheet.ciiva.com/176/mlccorderingcode-176767.pdf?src-supplier=Digi-Key, ComponentLink3URL=https://datasheet.ciiva.com/176/mlccorderingcode-176767.pdf?src-supplier=Digi-Key, ComponentLink4Description=https://datasheet.ciiva.com/28450/1359354-28450200.pdf?src-supplier=Element14, ComponentLink4URL=https://datasheet.ciiva.com/28450/1359354-28450200.pdf?src-supplier=Element14, ComponentLink5Description=https://datasheet.ciiva.com/7656/1525783-7656597.pdf?src-supplier=Element14, ComponentLink5URL=https://datasheet.ciiva.com/7656/1525783-7656597.pdf?src-supplier=Element14, Depth=0.3mm, Halogen Free="Halogen Free", Height=0.3mm, Lead Free="Lead Free", Length=0.6mm, Manufacturer Part Number=CC0201KRX5R5BB104, Mount="Surface Mount", Number of Pins=2, Packaging="Tape and Reel", Pricing="1=0.10000, 10=0.02400, 50=0.01340, 100=0.01090, 500=0.00776, 1000=0.00610, 2500=0.00555, 5000=0.00510 (USD)", REACH SVHC="No SVHC", RoHS=Yes, RoHS Compliant=Yes, Series=CC, Stock=2999877, Supplier 1=Digi-Key, Termination=SMD/SMT, Thickness=0.013inch, Voltage Rating (DC)=6.3V, Width=0.3mm
C7 C9: library part GRT188R61A106ME13D, "CAP CER 10UF 10V X5R 0603", Manufacturer="Murata Electronics", Operating Temperature="-55°C ~ 85°C", Package=0603, Ratings=AEC-Q200, Supplier Part Number 1=490-12312-1-ND, Temperature Coefficient=X5R, Tolerance=±20%, Voltage - Rated=10V, Category=Capacitors, ComponentLink1Description="Datasheet (Internal)", ComponentLink1URL=https://search.murata.co.jp/Ceramy/image/img/A01X/G101/ENG/GRT188R61A106ME13-01.pdf, ComponentLink2Description="Datasheet (External)", ComponentLink2URL=https://search.murata.co.jp/Ceramy/image/img/A01X/G101/ENG/GRT188R61A106ME13-01.pdf, Manufacturer Part Number=GRT188R61A106ME13D, Substitution Notes="10µF , 10V , ±20% , X5R , -55°C ~ 85°C , AEC-Q200 , 0603", Supplier 1=Digikey, Thickness (Max)=0.90MM
C11 C19: library part CGA2B2C0G1H180J050BA, "CAP CER 18PF 50V C0G 0402", Manufacturer="TDK Corporation", Operating Temperature="-55°C ~ 125°C", Package=0402, Ratings=AEC-Q200, Supplier Part Number 1=445-5587-1-ND, Temperature Coefficient="C0G, NP0", Tolerance=±5%, Voltage - Rated=50V, Category=Capacitors, ComponentLink1Description="Datasheet (Internal)", ComponentLink1URL=datasheets\TDK\mlcc_automotive_general_en.pdf, ComponentLink2Description="Datasheet (External)", ComponentLink2URL=https://product.tdk.com/info/en/catalog/datasheets/mlcc_automotive_general_en.pdf, Features=-, Manufacturer Part Number=CGA2B2C0G1H180J050BA, Substitution Notes="18pF , 50V , ±5% , C0G, NP0 , -55°C ~ 125°C , AEC-Q200 , 0402", Supplier 1=Digikey, Thickness (Max)=0.55MM
C43: library part CGA2B1X7R1C104K050BC, "CAP CER 0.1UF 16V X7R 0402", Manufacturer="TDK Corporation", Operating Temperature="-55°C ~ 125°C", Package=0402, Ratings=AEC-Q200, Supplier Part Number 1=445-5613-1-ND, Temperature Coefficient=X7R, Tolerance=±10%, Voltage - Rated=16V, Category=Capacitors, ComponentLink1Description="Datasheet (Internal)", ComponentLink1URL=datasheets\TDK\mlcc_automotive_general_en.pdf, ComponentLink2Description="Datasheet (External)", ComponentLink2URL=https://product.tdk.com/info/en/catalog/datasheets/mlcc_automotive_general_en.pdf, Features=-, Manufacturer Part Number=CGA2B1X7R1C104K050BC, Substitution Notes="0.1µF , 16V , ±10% , X7R , -55°C ~ 125°C , AEC-Q200 , 0402", Supplier 1=Digikey, Thickness (Max)=0.55MM
C44 C45: library part GCQ1555C1H9R5BB01D, "CAP CER 9.5PF 50V C0G/NP0 0402", Manufacturer="Murata Electronics", Operating Temperature="-55°C ~ 125°C", Package=0402, Ratings=AEC-Q200, Supplier Part Number 1=490-17528-1-ND, Temperature Coefficient="C0G, NP0", Tolerance=±0.1pF, Voltage - Rated=50V, Category=Capacitors, ComponentLink1Description="Datasheet (Internal)", ComponentLink1URL=https://search.murata.co.jp/Ceramy/image/img/A01X/G101/ENG/GCQ1555C1H9R5BB01-01.pdf, ComponentLink2Description="Datasheet (External)", ComponentLink2URL=https://search.murata.co.jp/Ceramy/image/img/A01X/G101/ENG/GCQ1555C1H9R5BB01-01.pdf, Manufacturer Part Number=GCQ1555C1H9R5BB01D, Substitution Notes="9.5pF , 50V , ±0.1pF , C0G, NP0 , -55°C ~ 125°C , AEC-Q200 , 0402", Supplier 1=Digikey, Thickness (Max)=0.55MM
D1 D2: "DIODE SCHOTTKY 30V 1A SOD323", Capacitance @ Vr- F="25pF @ 5V- 1MHz", Current - Average Rectified (Io)=1A, Current - Reverse Leakage @ Vr="50µA @ 15V", Manufacturer="Diodes Inc", Package="SC-76- SOD-323", Supplier Device Package=SOD-323, Supplier Part Number 1=BAT760DICT-ND, Voltage - DC Reverse (Vr) (Max)=30V, Voltage - Forward (Vf) (Max) @ If="550mV @ 1A", Category=Diodes, CategorySort=400, ComponentLink1Description="Internal Datasheet", ComponentLink1URL=http://www.diodes.com/datasheets/ds30498.pdf, ComponentLink2Description="External Datasheet", ComponentLink2URL=http://www.diodes.com/datasheets/ds30498.pdf, Diode Suffix=1A_2C, Diode Type=Schottky, Manufacturer Part Number=BAT760-7, Mounting Type="Surface Mount", Num Pins=2, Packaging="Cut Tape (CT)", Reverse Recovery Time (trr)=-, SortValue=BAT760-7, Speed="Fast Recovery =< 500ns- > 200mA (Io)", Supplier 1=Digi-Key
D3: library part APT1608CGCK, Color=Green, Current - Test=20mA, Luminous Flux @ Current - Test=-, Manufacturer="Kingbright Corp", Millicandela Rating=50mcd, Package / Case="0603 (1608 Metric)", Supplier Part Number 1=754-1116-1-ND, Voltage - Forward (Vf) Typ=2.1V, Category=Optoelectronics, ComponentLink1Description=http://www.us.kingbright.com/images/catalog/SPEC/APT1608CGCK.pdf, ComponentLink1URL=http://www.us.kingbright.com/images/catalog/SPEC/APT1608CGCK.pdf, Height=0.75mm, Lens Style/Size="Rectangle with Flat Top, 1.2mm x 0.8mm", Lens Type=Clear, Manufacturer Part Number=APT1608CGCK, Mounting Type="Surface Mount", Packaging="Tape & Reel (TR)", Pricing 1="1=0.2, 10=0.153, 25=0.1224, 100=0.1105, 250=0.102, 500=0.0918 (USD)", RoHS="RoHS Compliant", Size / Dimension="1.60mm L x 0.80mm W", Stock 1=89450, Supplier 1=Digi-Key, Supplier 2=Digikey, Supplier Part Number 2=160-2162-1-ND, Viewing Angle=120°, Wavelength - Dominant=570nm, Wavelength - Peak=574nm
D4: library part APT1608SURCK, Color=Red, Current - Test=20mA, Luminous Flux @ Current - Test=-, Manufacturer="Kingbright Corp", Millicandela Rating=220mcd, Package / Case="0603 (1608 Metric)", Supplier Part Number 1=754-1123-1-ND, Voltage - Forward (Vf) Typ=1.95V, Category=Optoelectronics, ComponentLink1Description=http://www.us.kingbright.com/images/catalog/SPEC/APT1608SURCK.pdf, ComponentLink1URL=http://www.us.kingbright.com/images/catalog/SPEC/APT1608SURCK.pdf, Height=0.75mm, Lens Style/Size="Rectangle, 1.2mm x 0.8mm", Lens Type=Clear, Manufacturer Part Number=APT1608SURCK, Mounting Type="Surface Mount", Packaging="Cut Tape (CT)", Pricing 1="1=0.16, 10=0.116, 25=0.0932, 100=0.0853, 250=0.07752, 500=0.06976, 1000=0.062 (USD)", RoHS="RoHS Compliant", Size / Dimension="1.60mm L x 0.80mm W", Stock 1=92099, Supplier 1=Digi-Key, Viewing Angle=120°, Wavelength - Dominant=630nm, Wavelength - Peak=650nm
F1 F2 F3 F4 F5 F6 F7 F8: library part Fiducial
J1: "Tag Connect Pads - No latching Clips - ARM"
J2: library part CORTEX-DEBUG, "SAMTEC - FTSH-105-01-F-DV - .050 X .050", Manufacturer=SAMTEC, Supplier Part Number 1=01R3399, Category=Connectors, Manufacturer Part Number=FTSH-105-01-F-DV, Pricing 1="1=0.974, 25000=0.835, 50000=0.774 (USD)", Stock 1=0, Supplier 1=Newark
L2 L3: library part NRH3012T2R2MN, "Inductor 2.2µH 1.5A", Inductance (uH)=2.2, Manufacturer="Taiyo Yuden", Package=NRH3012, Rating=-, Sort Value=2.2_1.5, Sort Value Package=2.2_1.5_NRH3012, Supplier Part Number 1=587-2589-1-ND, Tolerance=±20%, Category=Inductors, CategorySort=300, ComponentLink1Description="External Datasheet", ComponentLink1URL=https://www.yuden.co.jp/productdata/catalog/en/wound04_e.pdf, DCR Max (Ohms)="90 mOhm Max", Height (mm)=1.2MM, IRMS=1.37, Isat (A)=1.5, Manufacturer Part Number=NRH3012T2R2MN, Part Number=NRH3012T2R2MN, Shielding=Sheilded, SRF typ (MHz)=78MHz, Supplier 1=Digikey, Supplier Unit Price 1=0.28
R1: library part ERJ-2RKF1002X, "RES 10K OHM 1/10W 1% 0402 SMD", Limiting Element Voltage=50, Manufacturer="Panasonic Electronic Components", Maximum Overload Voltage=100, Maximum Working Voltage=31.6V, Package="0402 (1005 Metric)", Package Power="0402  (0.1W)", Power (Watts)="0.1W- 1/10W", Ratings=AEC-Q200, Sort Value=10000, Sort Value Package=402_10000, Supplier Package=0402, Supplier Part Number 1=P10.0KLCT-ND, Temperature Coefficient=±100ppm/°C, Tolerance=±1%, Category=Resistors, ComponentLink1Description="Internal Datasheet", ComponentLink1URL="datasheets\Panasonic Electronic Components\AOA0000CE2.pdf", ComponentLink2Description="External Datasheet", ComponentLink2URL=http://industrial.panasonic.com/www-data/pdf/AOA0000/AOA0000CE2.pdf, Composition="Thick Film", Features=-, Height=0.40MM, Manufacturer Part Number=ERJ-2RKF1002X, Number of Terminations=2, Packaging="Cut Tape (CT)", Resistance (Ohms)=10k, Size / Dimension="0.039\" L x 0.020\" W (1.00mm x 0.50mm)", Substitution Notes="10k , ±1% , 0402 , AEC-Q200", Supplier 1=Digi-Key
R2 R5: library part ERJ-2RKF2002X, "RES 20K OHM 1/10W 1% 0402 SMD", Limiting Element Voltage=50, Manufacturer="Panasonic Electronic Components", Maximum Overload Voltage=100, Maximum Working Voltage=44.7V, Package="0402 (1005 Metric)", Package Power="0402  (0.1W)", Power (Watts)="0.1W- 1/10W", Ratings=AEC-Q200, Sort Value=20000, Sort Value Package=402_20000, Supplier Package=0402, Supplier Part Number 1=P20.0KLCT-ND, Temperature Coefficient=±100ppm/°C, Tolerance=±1%, Category=Resistors, ComponentLink1Description="Internal Datasheet", ComponentLink1URL="datasheets\Panasonic Electronic Components\AOA0000CE2.pdf", ComponentLink2Description="External Datasheet", ComponentLink2URL=http://industrial.panasonic.com/www-data/pdf/AOA0000/AOA0000CE2.pdf, Composition="Thick Film", Features=-, Height=0.40MM, Manufacturer Part Number=ERJ-2RKF2002X, Number of Terminations=2, Packaging="Cut Tape (CT)", Resistance (Ohms)=20k, Size / Dimension="0.039\" L x 0.020\" W (1.00mm x 0.50mm)", Substitution Notes="20k , ±1% , 0402 , AEC-Q200", Supplier 1=Digi-Key
R3 R4: library part ERJ-2RKF2201X, "RES 2.2K OHM 1/10W 1% 0402 SMD", Limiting Element Voltage=50, Manufacturer="Panasonic Electronic Components", Maximum Overload Voltage=100, Maximum Working Voltage=14.8V, Package="0402 (1005 Metric)", Package Power="0402  (0.1W)", Power (Watts)="0.1W- 1/10W", Ratings=AEC-Q200, Sort Value=2200, Sort Value Package=402_2200, Supplier Package=0402, Supplier Part Number 1=P2.20KLCT-ND, Temperature Coefficient=±100ppm/°C, Tolerance=±1%, Category=Resistors, ComponentLink1Description="Internal Datasheet", ComponentLink1URL="datasheets\Panasonic Electronic Components\AOA0000CE2.pdf", ComponentLink2Description="External Datasheet", ComponentLink2URL=http://industrial.panasonic.com/www-data/pdf/AOA0000/AOA0000CE2.pdf, Composition="Thick Film", Features=-, Height=0.40MM, Manufacturer Part Number=ERJ-2RKF2201X, Number of Terminations=2, Packaging="Cut Tape (CT)", Resistance (Ohms)=2.2k, Size / Dimension="0.039\" L x 0.020\" W (1.00mm x 0.50mm)", Substitution Notes="2.2k , ±1% , 0402 , AEC-Q200", Supplier 1=Digi-Key
R6 R7 R10 R11 R21 R22: library part ERJ-2GE0R00X, "RES 0.0 OHM 1/10W JUMP 0402 SMD", Limiting Element Voltage=50, Manufacturer="Panasonic Electronic Components", Maximum Overload Voltage=100, Maximum Working Voltage=0.0V, Package="0402 (1005 Metric)", Package Power="0402  (0.1W)", Power (Watts)="0.1W- 1/10W", Ratings=AEC-Q200, Sort Value Package=402_0, Supplier Package=0402, Supplier Part Number 1=P0.0JCT-ND, Temperature Coefficient=-, Tolerance=Jumper, Category=Resistors, ComponentLink1Description="Internal Datasheet", ComponentLink1URL="datasheets\Panasonic Electronic Components\AOA0000CE1.pdf", ComponentLink2Description="External Datasheet", ComponentLink2URL=http://industrial.panasonic.com/www-data/pdf/AOA0000/AOA0000CE1.pdf, Composition="Thick Film", Features=-, Height=0.40MM, Manufacturer Part Number=ERJ-2GE0R00X, Number of Terminations=2, Resistance (Ohms)=0, Size / Dimension="0.039\" L x 0.020\" W (1.00mm x 0.50mm)", Sort Value=0, Substitution Notes="0 , Jumper , 0402 , AEC-Q200", Supplier 1=Digi-Key
R8 R9 R12 R13 R14 R15 R17 R18: library part ERJ-2RKF1003X, "RES 100K OHM 1/10W 1% 0402 SMD", Limiting Element Voltage=50, Manufacturer="Panasonic Electronic Components", Maximum Overload Voltage=100, Maximum Working Voltage=50.0V, Package="0402 (1005 Metric)", Package Power="0402  (0.1W)", Power (Watts)="0.1W- 1/10W", Ratings=AEC-Q200, Sort Value=100000, Sort Value Package=402_100000, Supplier Package=0402, Supplier Part Number 1=P100KLCT-ND, Temperature Coefficient=±100ppm/°C, Tolerance=±1%, Category=Resistors, ComponentLink1Description="Internal Datasheet", ComponentLink1URL="datasheets\Panasonic Electronic Components\AOA0000CE2.pdf", ComponentLink2Description="External Datasheet", ComponentLink2URL=http://industrial.panasonic.com/www-data/pdf/AOA0000/AOA0000CE2.pdf, Composition="Thick Film", Features=-, Height=0.40MM, Manufacturer Part Number=ERJ-2RKF1003X, Number of Terminations=2, Packaging="Cut Tape (CT)", Resistance (Ohms)=100k, Size / Dimension="0.039\" L x 0.020\" W (1.00mm x 0.50mm)", Substitution Notes="100k , ±1% , 0402 , AEC-Q200", Supplier 1=Digi-Key
R16 R19 R20: library part ERJ-2RKF1001X, "RES 1K OHM 1/10W 1% 0402 SMD", Limiting Element Voltage=50, Manufacturer="Panasonic Electronic Components", Maximum Overload Voltage=100, Maximum Working Voltage=10.0V, Package="0402 (1005 Metric)", Package Power="0402  (0.1W)", Power (Watts)="0.1W- 1/10W", Ratings=AEC-Q200, Sort Value=1000, Sort Value Package=402_1000, Supplier Package=0402, Supplier Part Number 1=P1.00KLCT-ND, Temperature Coefficient=±100ppm/°C, Tolerance=±1%, Category=Resistors, ComponentLink1Description="Internal Datasheet", ComponentLink1URL="datasheets\Panasonic Electronic Components\AOA0000CE2.pdf", ComponentLink2Description="External Datasheet", ComponentLink2URL=http://industrial.panasonic.com/www-data/pdf/AOA0000/AOA0000CE2.pdf, Composition="Thick Film", Features=-, Height=0.40MM, Manufacturer Part Number=ERJ-2RKF1001X, Number of Terminations=2, Packaging="Cut Tape (CT)", Resistance (Ohms)=1k, Size / Dimension="0.039\" L x 0.020\" W (1.00mm x 0.50mm)", Substitution Notes="1k , ±1% , 0402 , AEC-Q200", Supplier 1=Digi-Key
T1 T3 T5 T7 T9 T11 T13 T15 T17 T19 T20 T22 T24 T26 T28 T30 T32 T34 T36 T38 T39 T41 T43 T45 T47 T49 T51 T53 T55 T57 T58 T60 T62 T64 T66 T68 T70 T72 T74 T76 T85 T86 T88 T92: library part SQUARE_PAD
T4 T6 T8 T10 T12 T14 T16 T18 T21 T23 T25 T27 T29 T31 T33 T35 T37 T44 T48 T50 T54 T59 T63 T73 T75: library part RECT_PAD
U1: "SOC i.MX ARM Cortex M33 176-Pin VFBGA Tray", Manufacturer="NXP Semiconductors", Package=None, Availability=Warning, Check_prices=https://www.snapeda.com/parts/MIMXRT633SFVKB/Nexperia/view-part/5163781/?ref=eda, Manufacturer Part Number=MIMXRT685SFVKB, Price=None, Purchase-URL=https://pricing.snapeda.com/search/part/MIMXRT633SFVKB/?ref=eda, SnapEDA_Link=https://www.snapeda.com/parts/MIMXRT633SFVKB/Nexperia/view-part/5163781/?ref=snap
U2: "Power Management IC for Low-Power Microcontroller Applications 24-Pin HVQFN", Manufacturer="NXP Semiconductors", Supplier Part Number 1=771-PCA9420BSAZ, Check_prices=https://www.snapeda.com/parts/PCA9420BSAZ/NXP%20Semiconductors/view-part/5003095/?ref=eda, Manufacturer Part Number=PCA9420BSAZ, Pricing="1=3.09000, 10=2.78000, 50=2.63000, 100=2.28000, 1000=2.23000, 10000=2.20000 (USD)", RoHS=Yes, RoHS Compliant=Yes, SnapEDA_Link=https://www.snapeda.com/parts/PCA9420BSAZ/NXP%20Semiconductors/view-part/5003095/?ref=snap, Stock=953, Supplier 1=Mouser
U3: "IC BUFF NON-INVERT 2.7 V SOT23-5", Case/Package=SOT-23-5, High Level Output Current=9mA, Manufacturer="Texas Instruments", Max Operating Temperature=85°C, Max Supply Voltage=2.7V, Min Operating Temperature=-40°C, Min Supply Voltage=800mV, Package Quantity=3000, Quiescent Current=10uA, Supplier Part Number 1=296-12463-1-ND, Category="Buffers, Drivers and Transceivers", ComponentLink1Description=https://datasheet.ciiva.com/1833/sn74auc1g07-1833760.pdf?src-supplier=Digi-Key, ComponentLink1URL=https://datasheet.ciiva.com/1833/sn74auc1g07-1833760.pdf?src-supplier=Digi-Key, ComponentLink2Description=https://datasheet.ciiva.com/14302/sces373q-14302179.pdf?src-supplier=Avnet, ComponentLink2URL=https://datasheet.ciiva.com/14302/sces373q-14302179.pdf?src-supplier=Avnet, ComponentLink3Description=https://datasheet.ciiva.com/15094/getdatasheetpartid-69632-15094449.pdf?src-supplier=Verical, ComponentLink3URL=https://datasheet.ciiva.com/15094/getdatasheetpartid-69632-15094449.pdf?src-supplier=Verical, ComponentLink4Description=https://datasheet.ciiva.com/1833/sn74auc1g07-1833761.pdf?src-supplier=Digi-Key, ComponentLink4URL=https://datasheet.ciiva.com/1833/sn74auc1g07-1833761.pdf?src-supplier=Digi-Key, ComponentLink5Description=https://datasheet.ciiva.com/1833/sn74auc1g07-1833762.pdf?src-supplier=Digi-Key, ComponentLink5URL=https://datasheet.ciiva.com/1833/sn74auc1g07-1833762.pdf?src-supplier=Digi-Key, ComponentLink6Description=https://datasheet.ciiva.com/14302/sces373q-14302175.pdf?src-supplier=Avnet, ComponentLink6URL=https://datasheet.ciiva.com/14302/sces373q-14302175.pdf?src-supplier=Avnet, Lead Free="Lead Free", Logic Function=Buffer,Inverting, Low Level Output Current=9mA, Manufacturer Part Number=SN74AUC1G07DBVR, Mount="Surface Mount", Number of Bits=1, Number of Bits per Element=1, Number of Channels=1, Number of Elements=1, Number of Gates=1, Number of Input Lines=1, Number of Inputs=1, Number of Output Lines=1, Number of Outputs=1, Number of Pins=5, Packaging="Tape and Reel", Polarity=Non-Inverting, Pricing="1=0.41000, 10=0.32900, 25=0.30080, 100=0.22390, 250=0.20288, 500=0.16790, 1000=0.12593 (USD)", Propagation Delay=1.7ns, Radiation Hardening=No, REACH SVHC=Unknown, RoHS=Yes, RoHS Compliant=Yes, Series=74AUC, Stock=6487, Supplier 1=Digi-Key, Technology=CMOS, Turn-On Delay Time=3.3ns
U4: "TVS DIODE 5.5VWM SOT143B", Capacitance @ Frequency="1pF @ 1MHz", Current - Peak Pulse (10/1000µs)=-, Manufacturer="NXP Semiconductors", Operating Temperature="-40°C ~ 85°C (TA)", Package / Case="TO-253-4, TO-253AA", Power Line Protection=Yes, Supplier Device Package=SOT-143B, Supplier Part Number 1=568-4140-1-ND, Voltage - Breakdown (Min)=6V, Voltage - Reverse Standoff (Typ)="5.5V (Max)", Applications="General Purpose", Bidirectional Channels=2, Category="Circuit Protection", ComponentLink1Description=http://www.nxp.com/documents/data_sheet/PRTR5V0U2X.pdf, ComponentLink1URL=http://www.nxp.com/documents/data_sheet/PRTR5V0U2X.pdf, Manufacturer Part Number=PRTR5V0U2X,215, Mounting Type="Surface Mount", Packaging="Cut Tape (CT)", Power - Peak Pulse=-, Pricing="1=0.57, 10=0.477, 25=0.418, 100=0.3578, 250=0.31036, 500=0.26286, 1000=0.20265 (USD)", RoHS="RoHS Compliant", Stock=11734, Supplier 1=Digi-Key, Type="Steering (Rail to Rail)", Unidirectional Channels=-, Voltage - Clamping (Max) @ Ipp=-
U6: "3.3v Double-Data-Rate Octal SPI Xccela PSRAM", Manufacturer="AP Memory", Package=BGA-24, Availability="In Stock", Check_prices=https://eu.mouser.com/ProductDetail/AP-Memory/APS6408L-OBM-BA?qs=IS%252B4QmGtzzq1j2ngF%2F6ZwQ%3D%3D, Manufacturer Part Number=APS6408L-3OBM-BA, Mouser_Link=https://eu.mouser.com/ProductDetail/AP-Memory/APS6408L-OBM-BA?qs=IS%252B4QmGtzzq1j2ngF%2F6ZwQ%3D%3D, Price="2,09 €", Purchase-URL=https://eu.mouser.com/ProductDetail/AP-Memory/APS6408L-OBM-BA?qs=IS%252B4QmGtzzq1j2ngF%2F6ZwQ%3D%3D
X1: library part NX3215SA-32.768K-STD-MUA-9, "CRYSTAL 32.768KHZ 9PF SMD", Case/Package=SMD/SMT, ESR (Equivalent Series Resistance)=70kR, Frequency Tolerance=20ppm, Load Capacitance=9pF, Manufacturer=NDK, Max Operating Temperature=85°C, Min Operating Temperature=-40°C, Package Quantity=1000, Supplier Part Number 1=644-1155-6-ND, Frequency=32.768kHz, Height=0.035inch, Lead Free="Lead Free", Length=0.126inch, Manufacturer Part Number=NX3215SA-32.768K-STD-MUA-9, Mount="Surface Mount", Number of Pins=2, Packaging="Tape and Reel", Pricing 1="1=0.68, 10=0.602, 50=0.5628, 100=0.4974, 500=0.47124, 1000=0.3927 (USD)", Stock 1=39338, Supplier 1=Digi-Key, Width=0.059inch
X2: library part ABM3-24.000MHZ-B2-T, "CRYSTAL 24.000MHZ 18PF SMD", Frequency Stability=±50ppm, Frequency Tolerance=±20ppm, Load Capacitance=18pF, Manufacturer="Abracon Corporation", Operating Mode=Fundamental, Operating Temperature="-20°C ~ 70°C", Package / Case=2-SMD, Supplier Part Number 1=535-9106-1-ND, Category="Crystals and Oscillators", ComponentLink1Description=http://www.abracon.com/Resonators/abm3.pdf, ComponentLink1URL=http://www.abracon.com/Resonators/abm3.pdf, Frequency=24MHz, Height="0.051\" (1.30mm)", Manufacturer Part Number=ABM3-24.000MHZ-B2-T, Mounting Type="Surface Mount", Packaging="Cut Tape (CT)", Pricing 1="1=1.43, 10=1.235, 50=1.083, 100=0.855, 500=0.722 (USD)", RoHS="RoHS Compliant", Size / Dimension="0.197\" L x 0.126\" W (5.00mm x 3.20mm)", Stock 1=7349, Supplier 1=Digi-Key, Type="MHz Crystal"

## Free pads (board coordinates)
  round 170 hole 70: 2(-125,-1225) 2(-125,125) 2(1223,125) 2(1225,-1225)

## Via types
v1: diameter 18, hole 8, Top Layer to Bottom Layer, tented both sides, 124 vias
v2: diameter 12, hole 6, Top Layer to Bottom Layer, tented both sides, 83 vias

## Nets (pads, with @x,y where several pads share a name; then routed paths per layer and width w, separated by ;. In a path a pad name is that pad's centre, name@x,y a point inside that pad or via, vN(x,y) a via of type N, cw(c..) or ccw(c..) an arc to the next point about the centre after c; other vN are vias at no path point)
+1v8: C36.2 C37.2 C38.2 C39.2 C40.2 C41.2 R10.2 R21.1 U1.A13 U1.B11 U1.C4 U1.C16 U1.C17 U1.E4 U1.E15 U1.F13 U1.G14 U1.L4 U1.R15 | length 2010.4
  Top Layer w10: v2(186.57,-456.26) v2(186.57,-416.89) ; v2(363.74,-475.94) 363.74,-488.82 370.17,-495.25 383.04,-495.25 U1.G14@383.43,-495.63 ; U1.R15@403.11,-651.39 v2(403.11,-633.43) ; v2(422.8,-416.89) v2(442.48,-416.89) ; v1(491.32,-98.82) 491.5,-98.65 507.44,-98.65 R10.2@507.62,-98.47 v1(507.62,-117.89)